# EAGLE board Xbee_shield-GiantPanel-v15 (EAGLE 6.5.0), part 1 of 3
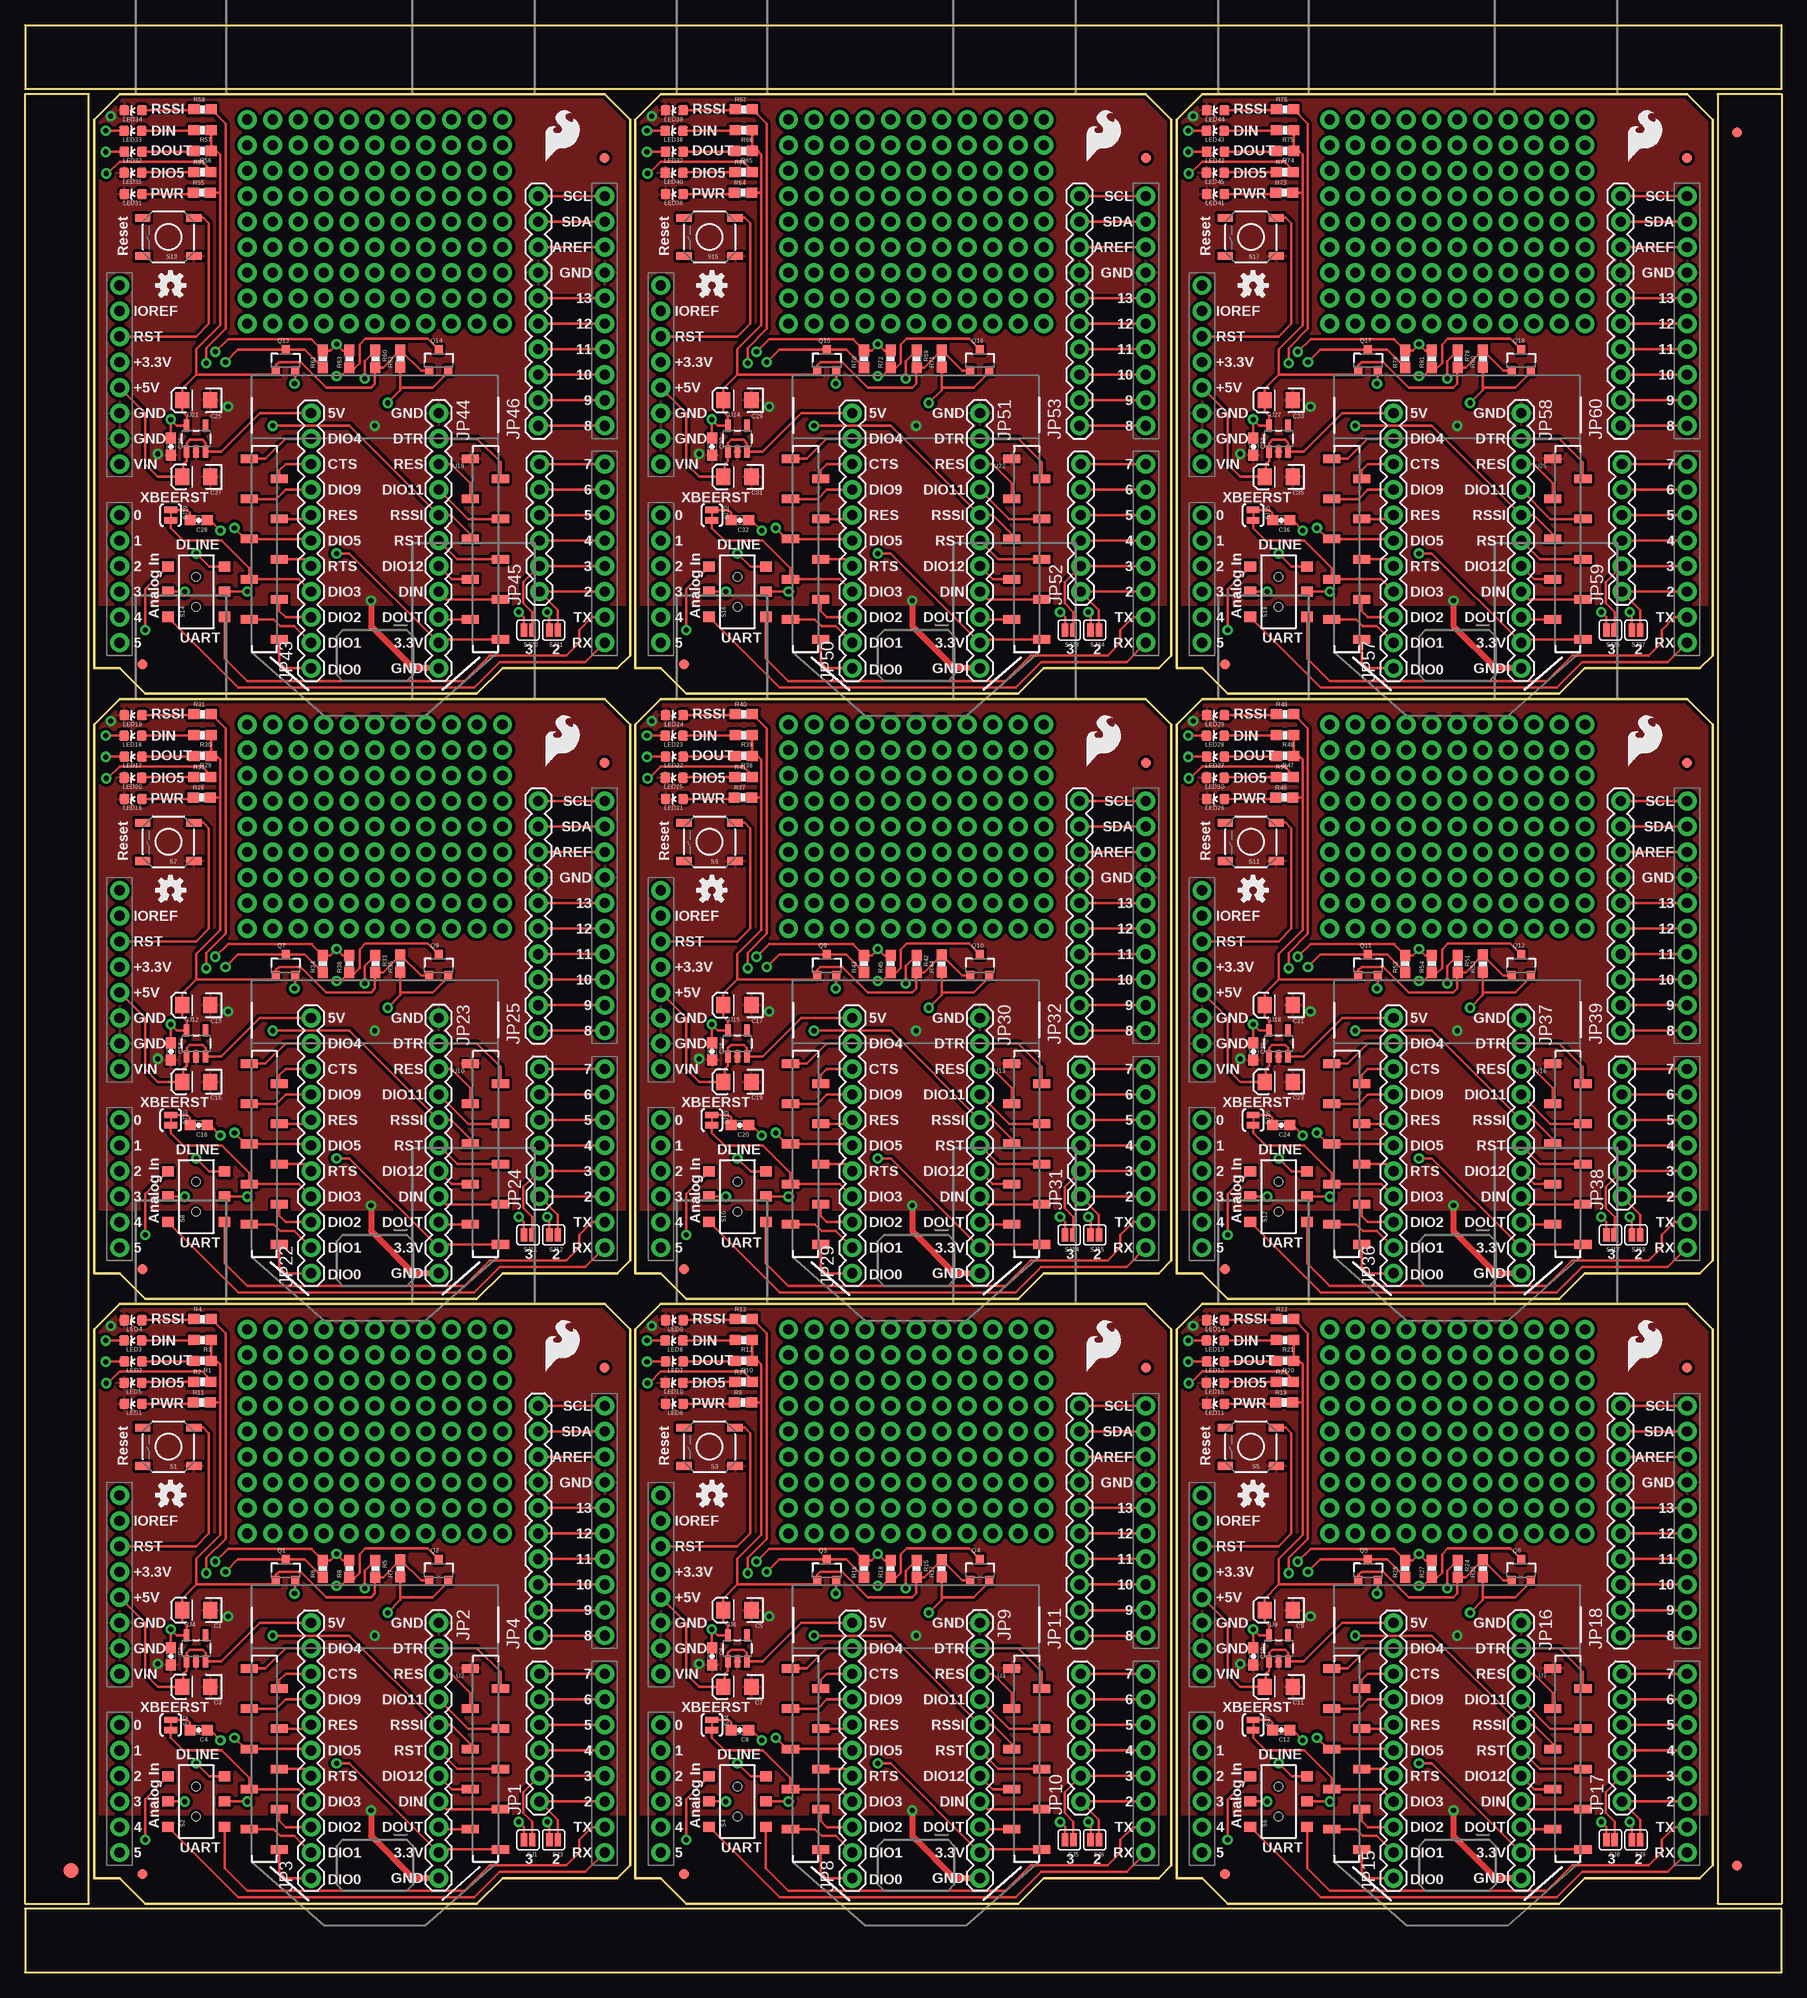
[diagram p0: board, top side]
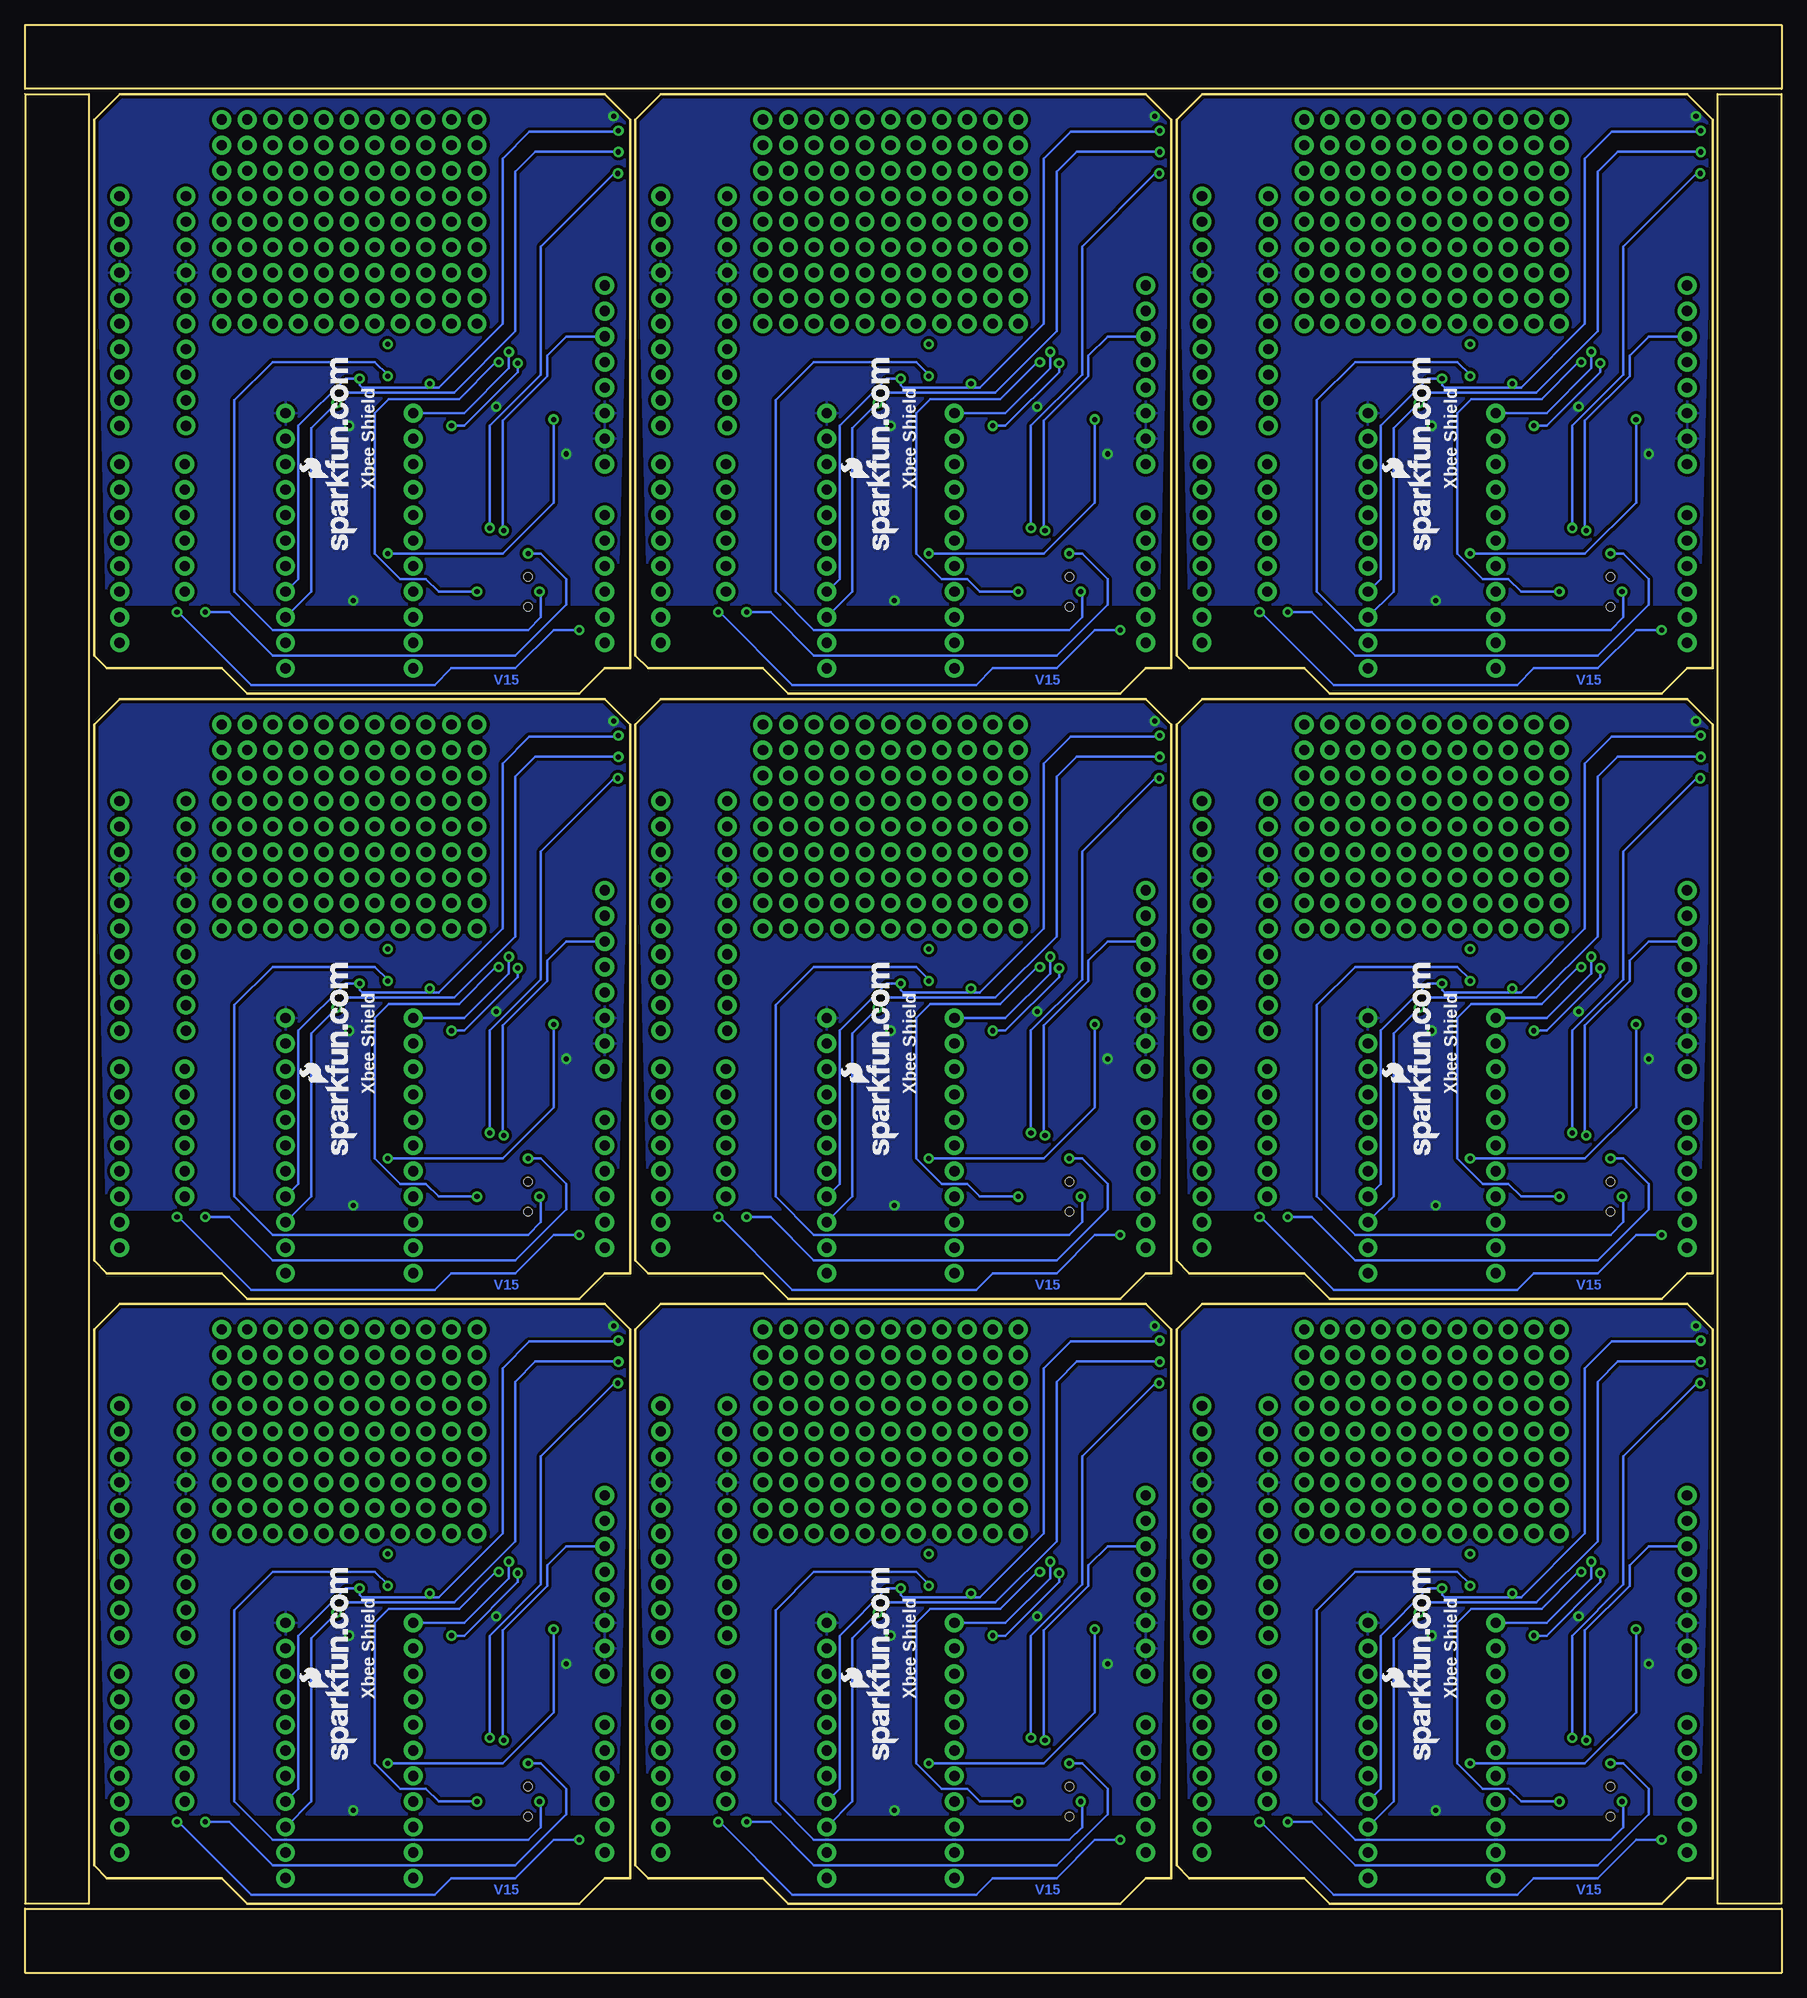
[diagram p1: board, bottom side, seen from below]

Size 174.75 x 193.8 mm. Coordinates in mm from the lower left corner, seen from the top.
Outline: 6.86,9.4 6.86,64.01 9.4,66.55 57.66,66.55 60.2,64.01 60.2,10.67 58.93,9.4 47.5,9.4 44.96,6.86 11.94,6.86 9.4,9.4 6.86,9.4
Outline: 60.71,9.4 60.71,64.01 63.25,66.55 111.51,66.55 114.05,64.01 114.05,10.67 112.78,9.4 101.35,9.4 98.81,6.86 65.79,6.86 63.25,9.4 60.71,9.4
Outline: 114.55,9.4 114.55,64.01 117.09,66.55 165.35,66.55 167.89,64.01 167.89,10.67 166.62,9.4 155.19,9.4 152.65,6.86 119.63,6.86 117.09,9.4 114.55,9.4
Outline: 6.86,69.6 6.86,124.21 9.4,126.75 57.66,126.75 60.2,124.21 60.2,70.87 58.93,69.6 47.5,69.6 44.96,67.06 11.94,67.06 9.4,69.6 6.86,69.6
Outline: 60.71,69.6 60.71,124.21 63.25,126.75 111.51,126.75 114.05,124.21 114.05,70.87 112.78,69.6 101.35,69.6 98.81,67.06 65.79,67.06 63.25,69.6 60.71,69.6
Outline: 114.55,69.6 114.55,124.21 117.09,126.75 165.35,126.75 167.89,124.21 167.89,70.87 166.62,69.6 155.19,69.6 152.65,67.06 119.63,67.06 117.09,69.6 114.55,69.6
Outline: 6.86,129.79 6.86,184.4 9.4,186.94 57.66,186.94 60.2,184.4 60.2,131.06 58.93,129.79 47.5,129.79 44.96,127.25 11.94,127.25 9.4,129.79 6.86,129.79
Outline: 60.71,129.79 60.71,184.4 63.25,186.94 111.51,186.94 114.05,184.4 114.05,131.06 112.78,129.79 101.35,129.79 98.81,127.25 65.79,127.25 63.25,129.79 60.71,129.79
Outline: 114.55,129.79 114.55,184.4 117.09,186.94 165.35,186.94 167.89,184.4 167.89,131.06 166.62,129.79 155.19,129.79 152.65,127.25 119.63,127.25 117.09,129.79 114.55,129.79
Outline: 6.35,6.86 6.35,186.94 0,186.94 0,6.86 6.35,6.86
Outline: 0,6.35 0,0 174.75,0 174.75,6.35 0,6.35
Outline: 168.4,6.86 174.75,6.86 174.75,186.94 168.4,186.94 168.4,6.86
Outline: 174.75,187.45 174.75,193.8 0,193.8 0,187.45 174.75,187.45
Copper layers (1*16): Top 0.035mm / dielectric 1.5mm / Bottom 0.035mm
Design rules "SparkFun-2-layer": minimum track width 7mil, minimum drill 15mil, track to track 8mil, track to pad 8mil, pad to pad 8mil, via to via 8mil, smd to smd 8mil, copper to edge 8mil, drill to drill 8mil, minimum pad ring 12mil, minimum via ring 10mil, stop-mask expansion 4mil, vias tented up to drill 20mil, thermal gap 10mil
Net classes: 0 default: width 0.203 mm; 1 vcc: width 0.305 mm

## Footprints (pad centres in the part's own frame; a part is rotated, then mirrored left to right if it is on the bottom)
EIA3216 = smd 1.4 x 1.6: A 1.4,0; C -1.4,0
0603-CAP = smd 1.1 x 1: 1 -0.85,0; 2 0.85,0
FIDUCIAL-1.5X3 = smd 1.5 x 1.5: 1 0,0
FIDUCIAL-1X2 = smd 1 x 1: 1 0,0
1X06 = drill 1.016 pad 1.88: 1 0,0; 2 2.54,0; 3 5.08,0; 4 7.62,0; 5 10.16,0; 6 12.7,0
1X11 = drill 1.016 pad 1.88: 1 0,0; 2 2.54,0; 3 5.08,0; 4 7.62,0; 5 10.16,0; 6 12.7,0; 7 15.24,0; 8 17.78,0; 9 20.32,0; 10 22.86,0; 11 25.4,0
1X10 = drill 1.016 pad 1.88: 1 0,0; 2 2.54,0; 3 5.08,0; 4 7.62,0; 5 10.16,0; 6 12.7,0; 7 15.24,0; 8 17.78,0; 9 20.32,0; 10 22.86,0
LED-0603 = smd 1 x 1: A 0,-0.877; C 0,0.877
SOT23-3 = smd 0.8 x 0.9: 1 -0.95,-1; 2 0.95,-1; 3 0,1.1
0603-RES = smd 1.1 x 1: 1 -0.85,0; 2 0.85,0
TACTILE_SWITCH_SMD = smd 1.524 x 0.762: 1 -2.54,1.905; 2 2.54,1.905; 3 -2.54,-1.905; 4 2.54,-1.905
AYZ0202 = smd 1 x 1.15: 1 -2.5,2.825; 2 0,2.825; 3 2.5,2.825; 4 -2.5,-2.825; 5 0,-2.825; 6 2.5,-2.825 | hole 0.85: 1.5,0; -1.5,0
SJ_2S = smd 0.635 x 1.27: 1 -0.412,0; 2 0.412,0
SJ_2S-TRACE = smd 0.635 x 1.27: 1 -0.508,0; 2 0.508,0
UNO_R3_SHIELD = drill 1.016 pad 1.88: 3.3V 50.8,26.67; 5V 50.8,29.21; A0 50.8,41.91; A1 50.8,44.45; A2 50.8,46.99; A3 50.8,49.53; A4 50.8,52.07; A5 50.8,54.61; AREF 2.54,15.24; D2 2.54,49.53; D3 2.54,46.99; D4 2.54,44.45; D5 2.54,41.91; D6 2.54,39.37; D7 2.54,36.83; D8 2.54,33.02; D9 2.54,30.48; D10 2.54,27.94; D11 2.54,25.4; D12 2.54,22.86; D13 2.54,20.32; GND@0 50.8,31.75; GND@1 50.8,34.29; GND@2 2.54,17.78; IOREF 50.8,21.59; NC 50.8,19.05; RES 50.8,24.13; RX 2.54,54.61; SCL 2.54,10.16; SDA 2.54,12.7; TX 2.54,52.07; VIN 50.8,36.83
XBEE-SMD = smd 1.7 x 0.85: 1 -12.5,20; 2 -9.5,18; 3 -12.5,16; 4 -9.5,14; 5 -12.5,12; 6 -9.5,10; 7 -12.5,8; 8 -9.5,6; 9 -12.5,4; 10 -9.5,2; 11 12.5,2; 12 9.5,4; 13 12.5,6; 14 9.5,8; 15 12.5,10; 16 9.5,12; 17 12.5,14; 18 9.5,16; 19 12.5,18; 20 9.5,20
SOT23-5 = smd 0.55 x 1.2: 1 -0.95,-1.3; 2 0,-1.3; 3 0.95,-1.3; 4 0.95,1.3; 5 -0.95,1.3

## Placement (x,y rotation side)
C1  10uF  [EIA3216]  17.02,36.07 180 top
C2  0.1uF  [0603-CAP]  14.5,31.47 270 top
C3  10uF  [EIA3216]  17.02,28.45 180 top
C4  0.1uF  [0603-CAP]  17.27,24.13 180 top
C5  10uF  [EIA3216]  70.87,36.07 180 top
C6  0.1uF  [0603-CAP]  68.35,31.47 270 top
C7  10uF  [EIA3216]  70.87,28.45 180 top
C8  0.1uF  [0603-CAP]  71.12,24.13 180 top
C9  10uF  [EIA3216]  124.71,36.07 180 top
C10  0.1uF  [0603-CAP]  122.2,31.47 270 top
C11  10uF  [EIA3216]  124.71,28.45 180 top
C12  0.1uF  [0603-CAP]  124.97,24.13 180 top
C13  10uF  [EIA3216]  17.02,96.27 180 top
C14  0.1uF  [0603-CAP]  14.5,91.67 270 top
C15  10uF  [EIA3216]  17.02,88.65 180 top
C16  0.1uF  [0603-CAP]  17.27,84.33 180 top
C17  10uF  [EIA3216]  70.87,96.27 180 top
C18  0.1uF  [0603-CAP]  68.35,91.67 270 top
C19  10uF  [EIA3216]  70.87,88.65 180 top
C20  0.1uF  [0603-CAP]  71.12,84.33 180 top
C21  10uF  [EIA3216]  124.71,96.27 180 top
C22  0.1uF  [0603-CAP]  122.2,91.67 270 top
C23  10uF  [EIA3216]  124.71,88.65 180 top
C24  0.1uF  [0603-CAP]  124.97,84.33 180 top
C25  10uF  [EIA3216]  17.02,156.46 180 top
C26  0.1uF  [0603-CAP]  14.5,151.87 270 top
C27  10uF  [EIA3216]  17.02,148.84 180 top
C28  0.1uF  [0603-CAP]  17.27,144.53 180 top
C29  10uF  [EIA3216]  70.87,156.46 180 top
C30  0.1uF  [0603-CAP]  68.35,151.87 270 top
C31  10uF  [EIA3216]  70.87,148.84 180 top
C32  0.1uF  [0603-CAP]  71.12,144.53 180 top
C33  10uF  [EIA3216]  124.71,156.46 180 top
C34  0.1uF  [0603-CAP]  122.2,151.87 270 top
C35  10uF  [EIA3216]  124.71,148.84 180 top
C36  0.1uF  [0603-CAP]  124.97,144.53 180 top
E$1  [FIDUCIAL-1.5X3]  4.57,10.16 0 top
E$4  [FIDUCIAL-1X2]  170.31,10.67 0 top
E$5  [FIDUCIAL-1X2]  170.31,183.13 180 top
JP1  [1X06]  51.18,17.02 90 top
JP2  M11PTH  [1X11]  41.15,34.8 270 top
JP3  M11PTH  [1X11]  28.45,9.4 90 top
JP4  [1X10]  51.05,33.53 90 top
JP5  FIDUCIAL1X2  [FIDUCIAL-1X2]  11.68,9.78 0 top
JP6  FIDUCIAL1X2  [FIDUCIAL-1X2]  57.66,60.2 0 top
JP7  LOGO-SFENEW  [SFE-NEW-WEBLOGO]  34.04,21.21 90 bottom
JP8  M11PTH  [1X11]  82.3,9.4 90 top
JP9  M11PTH  [1X11]  95,34.8 270 top
JP10  [1X06]  105.03,17.02 90 top
JP11  [1X10]  104.9,33.53 90 top
JP12  FIDUCIAL1X2  [FIDUCIAL-1X2]  65.53,9.78 0 top
JP13  FIDUCIAL1X2  [FIDUCIAL-1X2]  111.51,60.2 0 top
JP14  LOGO-SFENEW  [SFE-NEW-WEBLOGO]  87.88,21.21 90 bottom
JP15  M11PTH  [1X11]  136.14,9.4 90 top
JP16  M11PTH  [1X11]  148.84,34.8 270 top
JP17  [1X06]  158.88,17.02 90 top
JP18  [1X10]  158.75,33.53 90 top
JP19  FIDUCIAL1X2  [FIDUCIAL-1X2]  119.38,9.78 0 top
JP20  FIDUCIAL1X2  [FIDUCIAL-1X2]  165.35,60.2 0 top
JP21  LOGO-SFENEW  [SFE-NEW-WEBLOGO]  141.73,21.21 90 bottom
JP22  M11PTH  [1X11]  28.45,69.6 90 top
JP23  M11PTH  [1X11]  41.15,95 270 top
JP24  [1X06]  51.18,77.22 90 top
JP25  [1X10]  51.05,93.73 90 top
JP26  FIDUCIAL1X2  [FIDUCIAL-1X2]  11.68,69.98 0 top
JP27  FIDUCIAL1X2  [FIDUCIAL-1X2]  57.66,120.4 0 top
JP28  LOGO-SFENEW  [SFE-NEW-WEBLOGO]  34.04,81.41 90 bottom
JP29  M11PTH  [1X11]  82.3,69.6 90 top
JP30  M11PTH  [1X11]  95,95 270 top
JP31  [1X06]  105.03,77.22 90 top
JP32  [1X10]  104.9,93.73 90 top
JP33  FIDUCIAL1X2  [FIDUCIAL-1X2]  65.53,69.98 0 top
JP34  FIDUCIAL1X2  [FIDUCIAL-1X2]  111.51,120.4 0 top
JP35  LOGO-SFENEW  [SFE-NEW-WEBLOGO]  87.88,81.41 90 bottom
JP36  M11PTH  [1X11]  136.14,69.6 90 top
JP37  M11PTH  [1X11]  148.84,95 270 top
JP38  [1X06]  158.88,77.22 90 top
JP39  [1X10]  158.75,93.73 90 top
JP40  FIDUCIAL1X2  [FIDUCIAL-1X2]  119.38,69.98 0 top
JP41  FIDUCIAL1X2  [FIDUCIAL-1X2]  165.35,120.4 0 top
JP42  LOGO-SFENEW  [SFE-NEW-WEBLOGO]  141.73,81.41 90 bottom
JP43  M11PTH  [1X11]  28.45,129.79 90 top
JP44  M11PTH  [1X11]  41.15,155.19 270 top
JP45  [1X06]  51.18,137.41 90 top
JP46  [1X10]  51.05,153.92 90 top
JP47  FIDUCIAL1X2  [FIDUCIAL-1X2]  11.68,130.18 0 top
JP48  FIDUCIAL1X2  [FIDUCIAL-1X2]  57.66,180.59 0 top
JP49  LOGO-SFENEW  [SFE-NEW-WEBLOGO]  34.04,141.6 90 bottom
JP50  M11PTH  [1X11]  82.3,129.79 90 top
JP51  M11PTH  [1X11]  95,155.19 270 top
JP52  [1X06]  105.03,137.41 90 top
JP53  [1X10]  104.9,153.92 90 top
JP54  FIDUCIAL1X2  [FIDUCIAL-1X2]  65.53,130.18 0 top
JP55  FIDUCIAL1X2  [FIDUCIAL-1X2]  111.51,180.59 0 top
JP56  LOGO-SFENEW  [SFE-NEW-WEBLOGO]  87.88,141.6 90 bottom
JP57  M11PTH  [1X11]  136.14,129.79 90 top
JP58  M11PTH  [1X11]  148.84,155.19 270 top
JP59  [1X06]  158.88,137.41 90 top
JP60  [1X10]  158.75,153.92 90 top
JP61  FIDUCIAL1X2  [FIDUCIAL-1X2]  119.38,130.18 0 top
JP62  FIDUCIAL1X2  [FIDUCIAL-1X2]  165.35,180.59 0 top
JP63  LOGO-SFENEW  [SFE-NEW-WEBLOGO]  141.73,141.6 90 bottom
LED1  Red  [LED-0603]  10.74,56.59 90 top
LED2  Red  [LED-0603]  10.74,60.81 90 top
LED3  Green  [LED-0603]  10.72,62.89 90 top
LED4  Green  [LED-0603]  10.74,64.92 90 top
LED5  Green  [LED-0603]  10.72,58.7 90 top
LED6  Red  [LED-0603]  64.59,56.59 90 top
LED7  Red  [LED-0603]  64.59,60.81 90 top
LED8  Green  [LED-0603]  64.57,62.89 90 top
LED9  Green  [LED-0603]  64.59,64.92 90 top
LED10  Green  [LED-0603]  64.57,58.7 90 top
LED11  Red  [LED-0603]  118.44,56.59 90 top
LED12  Red  [LED-0603]  118.44,60.81 90 top
LED13  Green  [LED-0603]  118.41,62.89 90 top
LED14  Green  [LED-0603]  118.44,64.92 90 top
LED15  Green  [LED-0603]  118.41,58.7 90 top
LED16  Red  [LED-0603]  10.74,116.79 90 top
LED17  Red  [LED-0603]  10.74,121.01 90 top
LED18  Green  [LED-0603]  10.72,123.09 90 top
LED19  Green  [LED-0603]  10.74,125.12 90 top
LED20  Green  [LED-0603]  10.72,118.9 90 top
LED21  Red  [LED-0603]  64.59,116.79 90 top
LED22  Red  [LED-0603]  64.59,121.01 90 top
LED23  Green  [LED-0603]  64.57,123.09 90 top
LED24  Green  [LED-0603]  64.59,125.12 90 top
LED25  Green  [LED-0603]  64.57,118.9 90 top
LED26  Red  [LED-0603]  118.44,116.79 90 top
LED27  Red  [LED-0603]  118.44,121.01 90 top
LED28  Green  [LED-0603]  118.41,123.09 90 top
LED29  Green  [LED-0603]  118.44,125.12 90 top
LED30  Green  [LED-0603]  118.41,118.9 90 top
LED31  Red  [LED-0603]  10.74,176.99 90 top
LED32  Red  [LED-0603]  10.74,181.2 90 top
LED33  Green  [LED-0603]  10.72,183.29 90 top
LED34  Green  [LED-0603]  10.74,185.32 90 top
LED35  Green  [LED-0603]  10.72,179.1 90 top
LED36  Red  [LED-0603]  64.59,176.99 90 top
LED37  Red  [LED-0603]  64.59,181.2 90 top
LED38  Green  [LED-0603]  64.57,183.29 90 top
LED39  Green  [LED-0603]  64.59,185.32 90 top
LED40  Green  [LED-0603]  64.57,179.1 90 top
LED41  Red  [LED-0603]  118.44,176.99 90 top
LED42  Red  [LED-0603]  118.44,181.2 90 top
LED43  Green  [LED-0603]  118.41,183.29 90 top
LED44  Green  [LED-0603]  118.44,185.32 90 top
LED45  Green  [LED-0603]  118.41,179.1 90 top
Q1  MOSFET-NCHANNELSMD  [SOT23-3]  25.91,40.01 0 top
Q2  MOSFET-NCHANNELSMD  [SOT23-3]  41.15,40.01 0 top
Q3  MOSFET-NCHANNELSMD  [SOT23-3]  79.76,40.01 0 top
Q4  MOSFET-NCHANNELSMD  [SOT23-3]  95,40.01 0 top
Q5  MOSFET-NCHANNELSMD  [SOT23-3]  133.6,40.01 0 top
Q6  MOSFET-NCHANNELSMD  [SOT23-3]  148.84,40.01 0 top
Q7  MOSFET-NCHANNELSMD  [SOT23-3]  25.91,100.2 0 top
Q8  MOSFET-NCHANNELSMD  [SOT23-3]  41.15,100.2 0 top
Q9  MOSFET-NCHANNELSMD  [SOT23-3]  79.76,100.2 0 top
Q10  MOSFET-NCHANNELSMD  [SOT23-3]  95,100.2 0 top
Q11  MOSFET-NCHANNELSMD  [SOT23-3]  133.6,100.2 0 top
Q12  MOSFET-NCHANNELSMD  [SOT23-3]  148.84,100.2 0 top
Q13  MOSFET-NCHANNELSMD  [SOT23-3]  25.91,160.4 0 top
Q14  MOSFET-NCHANNELSMD  [SOT23-3]  41.15,160.4 0 top
Q15  MOSFET-NCHANNELSMD  [SOT23-3]  79.76,160.4 0 top
Q16  MOSFET-NCHANNELSMD  [SOT23-3]  95,160.4 0 top
Q17  MOSFET-NCHANNELSMD  [SOT23-3]  133.6,160.4 0 top
Q18  MOSFET-NCHANNELSMD  [SOT23-3]  148.84,160.4 0 top
R1  1k  [0603-RES]  17.65,60.88 180 top
R2  1k  [0603-RES]  17.63,58.78 0 top
R3  1k  [0603-RES]  17.65,62.94 180 top
R4  1k  [0603-RES]  17.65,65.02 0 top
R5  1k  [0603-RES]  34.85,40.18 270 top
R6  1k  [0603-RES]  29.62,40.18 90 top
R7  1k  [0603-RES]  37.34,40.21 90 top
R8  1k  [0603-RES]  32.26,40.18 90 top
R9  1k  [0603-RES]  71.42,56.74 0 top
R10  1k  [0603-RES]  71.5,60.88 180 top
R11  1k  [0603-RES]  17.58,56.74 0 top
R12  1k  [0603-RES]  71.5,62.94 180 top
R13  1k  [0603-RES]  71.5,65.02 0 top
R14  1k  [0603-RES]  71.48,58.78 0 top
R15  1k  [0603-RES]  88.7,40.18 270 top
R16  1k  [0603-RES]  83.46,40.18 90 top
R17  1k  [0603-RES]  91.19,40.21 90 top
R18  1k  [0603-RES]  86.11,40.18 90 top
R19  1k  [0603-RES]  125.27,56.74 0 top
R20  1k  [0603-RES]  125.35,60.88 180 top
R21  1k  [0603-RES]  125.35,62.94 180 top
R22  1k  [0603-RES]  125.35,65.02 0 top
R23  1k  [0603-RES]  125.32,58.78 0 top
R24  1k  [0603-RES]  142.54,40.18 270 top
R25  1k  [0603-RES]  137.31,40.18 90 top
R26  1k  [0603-RES]  145.03,40.21 90 top
R27  1k  [0603-RES]  139.95,40.18 90 top
R28  1k  [0603-RES]  17.58,116.94 0 top
R29  1k  [0603-RES]  17.65,121.08 180 top
R30  1k  [0603-RES]  17.65,123.14 180 top
R31  1k  [0603-RES]  17.65,125.22 0 top
R32  1k  [0603-RES]  17.63,118.97 0 top
R33  1k  [0603-RES]  34.85,100.38 270 top
R34  1k  [0603-RES]  29.62,100.38 90 top
R35  1k  [0603-RES]  37.34,100.41 90 top
R36  1k  [0603-RES]  32.26,100.38 90 top
R37  1k  [0603-RES]  71.42,116.94 0 top
R38  1k  [0603-RES]  71.5,121.08 180 top
R39  1k  [0603-RES]  71.5,123.14 180 top
R40  1k  [0603-RES]  71.5,125.22 0 top
R41  1k  [0603-RES]  71.48,118.97 0 top
R42  1k  [0603-RES]  88.7,100.38 270 top
R43  1k  [0603-RES]  83.46,100.38 90 top
R44  1k  [0603-RES]  91.19,100.41 90 top
R45  1k  [0603-RES]  86.11,100.38 90 top
R46  1k  [0603-RES]  125.27,116.94 0 top
R47  1k  [0603-RES]  125.35,121.08 180 top
R48  1k  [0603-RES]  125.35,123.14 180 top
R49  1k  [0603-RES]  125.35,125.22 0 top
R50  1k  [0603-RES]  125.32,118.97 0 top
R51  1k  [0603-RES]  142.54,100.38 270 top
R52  1k  [0603-RES]  137.31,100.38 90 top
R53  1k  [0603-RES]  145.03,100.41 90 top
R54  1k  [0603-RES]  139.95,100.38 90 top
R55  1k  [0603-RES]  17.58,177.14 0 top
R56  1k  [0603-RES]  17.65,181.28 180 top
R57  1k  [0603-RES]  17.65,183.34 180 top
R58  1k  [0603-RES]  17.65,185.42 0 top
R59  1k  [0603-RES]  17.63,179.17 0 top
R60  1k  [0603-RES]  34.85,160.58 270 top
R61  1k  [0603-RES]  29.62,160.58 90 top
R62  1k  [0603-RES]  37.34,160.6 90 top
R63  1k  [0603-RES]  32.26,160.58 90 top
R64  1k  [0603-RES]  71.42,177.14 0 top
R65  1k  [0603-RES]  71.5,181.28 180 top
R66  1k  [0603-RES]  71.5,183.34 180 top
R67  1k  [0603-RES]  71.5,185.42 0 top
R68  1k  [0603-RES]  71.48,179.17 0 top
R69  1k  [0603-RES]  88.7,160.58 270 top
R70  1k  [0603-RES]  83.46,160.58 90 top
R71  1k  [0603-RES]  91.19,160.6 90 top
R72  1k  [0603-RES]  86.11,160.58 90 top
R73  1k  [0603-RES]  125.27,177.14 0 top
R74  1k  [0603-RES]  125.35,181.28 180 top
R75  1k  [0603-RES]  125.35,183.34 180 top
R76  1k  [0603-RES]  125.35,185.42 0 top
R77  1k  [0603-RES]  125.32,179.17 0 top
R78  1k  [0603-RES]  142.54,160.58 270 top
R79  1k  [0603-RES]  137.31,160.58 90 top
R80  1k  [0603-RES]  145.03,160.6 90 top
R81  1k  [0603-RES]  139.95,160.58 90 top
S1  SWITCH-MOMENTARY-2SMD  [TACTILE_SWITCH_SMD]  14.25,52.32 180 top
S2  SWITCH-DPDTSMD  [AYZ0202]  17.02,17.02 90 top
S3  SWITCH-MOMENTARY-2SMD  [TACTILE_SWITCH_SMD]  68.1,52.32 180 top
S4  SWITCH-DPDTSMD  [AYZ0202]  70.87,17.02 90 top
S5  SWITCH-MOMENTARY-2SMD  [TACTILE_SWITCH_SMD]  121.95,52.32 180 top
S6  SWITCH-DPDTSMD  [AYZ0202]  124.71,17.02 90 top
S7  SWITCH-MOMENTARY-2SMD  [TACTILE_SWITCH_SMD]  14.25,112.52 180 top
S8  SWITCH-DPDTSMD  [AYZ0202]  17.02,77.22 90 top
S9  SWITCH-MOMENTARY-2SMD  [TACTILE_SWITCH_SMD]  68.1,112.52 180 top
S10  SWITCH-DPDTSMD  [AYZ0202]  70.87,77.22 90 top
S11  SWITCH-MOMENTARY-2SMD  [TACTILE_SWITCH_SMD]  121.95,112.52 180 top
S12  SWITCH-DPDTSMD  [AYZ0202]  124.71,77.22 90 top
S13  SWITCH-MOMENTARY-2SMD  [TACTILE_SWITCH_SMD]  14.25,172.72 180 top
S14  SWITCH-DPDTSMD  [AYZ0202]  17.02,137.41 90 top
S15  SWITCH-MOMENTARY-2SMD  [TACTILE_SWITCH_SMD]  68.1,172.72 180 top
S16  SWITCH-DPDTSMD  [AYZ0202]  70.87,137.41 90 top
S17  SWITCH-MOMENTARY-2SMD  [TACTILE_SWITCH_SMD]  121.95,172.72 180 top
S18  SWITCH-DPDTSMD  [AYZ0202]  124.71,137.41 90 top
SJ1  D_TX  [SJ_2S]  50.04,13.21 180 top
SJ2  SOLDERJUMPERTRACE  [SJ_2S-TRACE]  14.48,24.64 270 top
SJ3  D_RX  [SJ_2S]  52.58,13.21 180 top
SJ4  SOLDERJUMPERTRACE  [SJ_2S-TRACE]  68.33,24.64 270 top
SJ5  D_TX  [SJ_2S]  103.89,13.21 180 top
SJ6  D_RX  [SJ_2S]  106.43,13.21 180 top
SJ7  SOLDERJUMPERTRACE  [SJ_2S-TRACE]  122.17,24.64 270 top
SJ8  D_TX  [SJ_2S]  157.73,13.21 180 top
SJ9  D_RX  [SJ_2S]  160.27,13.21 180 top
SJ10  SOLDERJUMPERTRACE  [SJ_2S-TRACE]  14.48,84.84 270 top
SJ11  D_TX  [SJ_2S]  50.04,73.41 180 top
SJ12  D_RX  [SJ_2S]  52.58,73.41 180 top
SJ13  SOLDERJUMPERTRACE  [SJ_2S-TRACE]  68.33,84.84 270 top
SJ14  D_TX  [SJ_2S]  103.89,73.41 180 top
SJ15  D_RX  [SJ_2S]  106.43,73.41 180 top
SJ16  SOLDERJUMPERTRACE  [SJ_2S-TRACE]  122.17,84.84 270 top
SJ17  D_TX  [SJ_2S]  157.73,73.41 180 top
SJ18  D_RX  [SJ_2S]  160.27,73.41 180 top
SJ19  SOLDERJUMPERTRACE  [SJ_2S-TRACE]  14.48,145.03 270 top
SJ20  D_TX  [SJ_2S]  50.04,133.6 180 top
SJ21  D_RX  [SJ_2S]  52.58,133.6 180 top
SJ22  SOLDERJUMPERTRACE  [SJ_2S-TRACE]  68.33,145.03 270 top
SJ23  D_TX  [SJ_2S]  103.89,133.6 180 top
SJ24  D_RX  [SJ_2S]  106.43,133.6 180 top
SJ25  SOLDERJUMPERTRACE  [SJ_2S-TRACE]  122.17,145.03 270 top
SJ26  D_TX  [SJ_2S]  157.73,133.6 180 top
SJ27  D_RX  [SJ_2S]  160.27,133.6 180 top
U1  ARDUINO_SHIELD  [UNO_R3_SHIELD]  60.2,66.55 180 top
U2  XBEE-1B3  [XBEE-SMD]  34.8,32.26 180 top
U3  XBEE-1B3  [XBEE-SMD]  88.65,32.26 180 top
U4  V_REG_LDOSMD  [SOT23-5]  17.02,32.26 0 top
U5  ARDUINO_SHIELD  [UNO_R3_SHIELD]  114.05,66.55 180 top
U6  V_REG_LDOSMD  [SOT23-5]  70.87,32.26 0 top
U7  XBEE-1B3  [XBEE-SMD]  142.49,32.26 180 top
U8  ARDUINO_SHIELD  [UNO_R3_SHIELD]  167.89,66.55 180 top
U9  V_REG_LDOSMD  [SOT23-5]  124.71,32.26 0 top
U10  XBEE-1B3  [XBEE-SMD]  34.8,92.46 180 top
U11  ARDUINO_SHIELD  [UNO_R3_SHIELD]  60.2,126.75 180 top
U12  V_REG_LDOSMD  [SOT23-5]  17.02,92.46 0 top
U13  XBEE-1B3  [XBEE-SMD]  88.65,92.46 180 top
U14  ARDUINO_SHIELD  [UNO_R3_SHIELD]  114.05,126.75 180 top
U15  V_REG_LDOSMD  [SOT23-5]  70.87,92.46 0 top
U16  XBEE-1B3  [XBEE-SMD]  142.49,92.46 180 top
U17  ARDUINO_SHIELD  [UNO_R3_SHIELD]  167.89,126.75 180 top
U18  V_REG_LDOSMD  [SOT23-5]  124.71,92.46 0 top
U19  XBEE-1B3  [XBEE-SMD]  34.8,152.65 180 top
U20  ARDUINO_SHIELD  [UNO_R3_SHIELD]  60.2,186.94 180 top
U21  V_REG_LDOSMD  [SOT23-5]  17.02,152.65 0 top
U22  XBEE-1B3  [XBEE-SMD]  88.65,152.65 180 top
U23  ARDUINO_SHIELD  [UNO_R3_SHIELD]  114.05,186.94 180 top
U24  V_REG_LDOSMD  [SOT23-5]  70.87,152.65 0 top
U25  XBEE-1B3  [XBEE-SMD]  142.49,152.65 180 top
U26  ARDUINO_SHIELD  [UNO_R3_SHIELD]  167.89,186.94 180 top
U27  V_REG_LDOSMD  [SOT23-5]  124.71,152.65 0 top
U$1  [SFE_LOGO_FLAME_.2]  51.44,59.56 0 top
U$2  OSHW-LOGOS  [OSHW-LOGO-S]  68.33,47.5 0 top
U$3  [SFE_LOGO_FLAME_.2]  105.28,59.56 0 top
U$4  OSHW-LOGOS  [OSHW-LOGO-S]  122.17,47.5 0 top
U$5  [SFE_LOGO_FLAME_.2]  159.13,59.56 0 top
U$6  OSHW-LOGOS  [OSHW-LOGO-S]  14.48,107.7 0 top
U$7  [SFE_LOGO_FLAME_.2]  51.44,119.76 0 top
U$8  OSHW-LOGOS  [OSHW-LOGO-S]  14.48,47.5 0 top
U$9  OSHW-LOGOS  [OSHW-LOGO-S]  68.33,107.7 0 top
U$10  [SFE_LOGO_FLAME_.2]  105.28,119.76 0 top
U$11  OSHW-LOGOS  [OSHW-LOGO-S]  122.17,107.7 0 top
U$12  [SFE_LOGO_FLAME_.2]  159.13,119.76 0 top
U$13  OSHW-LOGOS  [OSHW-LOGO-S]  14.48,167.89 0 top
U$14  [SFE_LOGO_FLAME_.2]  51.44,179.96 0 top
U$15  OSHW-LOGOS  [OSHW-LOGO-S]  68.33,167.89 0 top
U$16  [SFE_LOGO_FLAME_.2]  105.28,179.96 0 top
U$17  OSHW-LOGOS  [OSHW-LOGO-S]  122.17,167.89 0 top
U$18  [SFE_LOGO_FLAME_.2]  159.13,179.96 0 top

## Library data of the parts
C1 C3 C5 C7 C9 C11 C13 C15 C17 C19 C21 C23 C25 C27 C29 C31 C33 C35 JP1-JP3 JP5 JP6 JP8-JP10 JP12 JP13 JP15-JP17 JP19 JP20 JP22-JP24 JP26 JP27 JP29-JP31 JP33 JP34 JP36-JP38 JP40 JP41 JP43-JP45 JP47 JP48 JP50-JP52 JP54 JP55 JP57-JP59 JP61 JP62 S1-S18 SJ1-SJ27 U2 U3 U7 U10 U13 U16 U19 U22 U25 = SparkFun
C2 C4 C6 C8 C10 C12 C14 C16 C18 C20 C22 C24 C26 C28 C30 C32 C34 C36 = SparkFun-Capacitors; PROD_ID: CAP-00810
E$1 = SparkFun-Retired
E$4 E$5 JP7 JP14 JP21 JP28 JP35 JP42 JP49 JP56 JP63 U$1-U$18 = SparkFun-Aesthetics
JP4 JP11 JP18 JP25 JP32 JP39 JP46 JP53 JP60 = SparkFun-Connectors
LED1 LED2 LED6 LED7 LED11 LED12 LED16 LED17 LED21 LED22 LED26 LED27 LED31 LED32 LED36 LED37 LED41 LED42 = SparkFun-LED; PROD_ID: DIO-00819
LED3-LED5 LED8-LED10 LED13-LED15 LED18-LED20 LED23-LED25 LED28-LED30 LED33-LED35 LED38-LED40 LED43-LED45 = SparkFun-LED; PROD_ID: DIO-00821
Q1-Q18 = SparkFun-DiscreteSemi
R1-R81 = SparkFun-Resistors; PROD_ID: RES-07856
U1 U5 U8 U11 U14 U17 U20 U23 U26 = SparkFun-Boards
U4 U6 U9 U12 U15 U18 U21 U24 U27 = SparkFun-PowerIC

## Nets
3.3V: C1.A C2.1 JP2.10 Q1.1 Q2.1 R1.1 R3.1 R5.2 R7.2 R11.2 U2.1 U4.5
3.3V1: C5.A C6.1 JP9.10 Q3.1 Q4.1 R9.2 R10.1 R12.1 R15.2 R17.2 U3.1 U6.5
3.3V2: C9.A C10.1 JP16.10 Q5.1 Q6.1 R19.2 R20.1 R21.1 R24.2 R26.2 U7.1 U9.5
3.3V3: C13.A C14.1 JP23.10 Q7.1 Q8.1 R28.2 R29.1 R30.1 R33.2 R35.2 U10.1 U12.5
3.3V4: C17.A C18.1 JP30.10 Q9.1 Q10.1 R37.2 R38.1 R39.1 R42.2 R44.2 U13.1 U15.5
3.3V5: C21.A C22.1 JP37.10 Q11.1 Q12.1 R46.2 R47.1 R48.1 R51.2 R53.2 U16.1 U18.5
3.3V6: C25.A C26.1 JP44.10 Q13.1 Q14.1 R55.2 R56.1 R57.1 R60.2 R62.2 U19.1 U21.5
3.3V7: C29.A C30.1 JP51.10 Q15.1 Q16.1 R64.2 R65.1 R66.1 R69.2 R71.2 U22.1 U24.5
3.3V8: C33.A C34.1 JP58.10 Q17.1 Q18.1 R73.2 R74.1 R75.1 R78.2 R80.2 U25.1 U27.5
5V: C3.A JP3.11 R6.2 R8.2 U1.5V U4.1 U4.3
5V1: C7.A JP8.11 R16.2 R18.2 U5.5V U6.1 U6.3
5V2: C11.A JP15.11 R25.2 R27.2 U8.5V U9.1 U9.3
5V3: C15.A JP22.11 R34.2 R36.2 U11.5V U12.1 U12.3
5V4: C19.A JP29.11 R43.2 R45.2 U14.5V U15.1 U15.3
5V5: C23.A JP36.11 R52.2 R54.2 U17.5V U18.1 U18.3
5V6: C27.A JP43.11 R61.2 R63.2 U20.5V U21.1 U21.3
5V7: C31.A JP50.11 R70.2 R72.2 U23.5V U24.1 U24.3
5V8: C35.A JP57.11 R79.2 R81.2 U26.5V U27.1 U27.3
AREF: JP4.8 U1.AREF
AREF1: JP11.8 U5.AREF
AREF2: JP18.8 U8.AREF
AREF3: JP25.8 U11.AREF
AREF4: JP32.8 U14.AREF
AREF5: JP39.8 U17.AREF
AREF6: JP46.8 U20.AREF
AREF7: JP53.8 U23.AREF
AREF8: JP60.8 U26.AREF
CTS: JP3.9 U2.12
CTS1: JP8.9 U3.12
CTS2: JP15.9 U7.12
CTS3: JP22.9 U10.12
CTS4: JP29.9 U13.12
CTS5: JP36.9 U16.12
CTS6: JP43.9 U19.12
CTS7: JP50.9 U22.12
CTS8: JP57.9 U25.12
D_RX: JP1.1 SJ3.1 U1.D2
D_RX1: JP10.1 SJ6.1 U5.D2
D_RX2: JP17.1 SJ9.1 U8.D2
D_RX3: JP24.1 SJ12.1 U11.D2
D_RX4: JP31.1 SJ15.1 U14.D2
D_RX5: JP38.1 SJ18.1 U17.D2
D_RX6: JP45.1 SJ21.1 U20.D2
D_RX7: JP52.1 SJ24.1 U23.D2
D_RX8: JP59.1 SJ27.1 U26.D2
D_TX: JP1.2 SJ1.1 U1.D3
D_TX1: JP10.2 SJ5.1 U5.D3
D_TX2: JP17.2 SJ8.1 U8.D3
D_TX3: JP24.2 SJ11.1 U11.D3
D_TX4: JP31.2 SJ14.1 U14.D3
D_TX5: JP38.2 SJ17.1 U17.D3
D_TX6: JP45.2 SJ20.1 U20.D3
D_TX7: JP52.2 SJ23.1 U23.D3
D_TX8: JP59.2 SJ26.1 U26.D3
DIN: JP2.8 LED3.C Q1.2 R5.1 U2.3
DIN1: JP9.8 LED8.C Q3.2 R15.1 U3.3
DIN2: JP16.8 LED13.C Q5.2 R24.1 U7.3
DIN3: JP23.8 LED18.C Q7.2 R33.1 U10.3
DIN4: JP30.8 LED23.C Q9.2 R42.1 U13.3
DIN5: JP37.8 LED28.C Q11.2 R51.1 U16.3
DIN6: JP44.8 LED33.C Q13.2 R60.1 U19.3
DIN7: JP51.8 LED38.C Q15.2 R69.1 U22.3
DIN8: JP58.8 LED43.C Q17.2 R78.1 U25.3
DIO0: JP3.1 U2.20
DIO1: JP3.2 U2.19
DIO2: JP3.3 U2.18
DIO3: JP3.4 SJ2.2 U2.17
DIO4: JP3.10 U2.11
DIO5: JP3.6 R2.2 U2.15
DIO6: JP8.10 U3.11
DIO7: JP8.8 U3.13
DIO8: JP8.6 R14.2 U3.15
DIO9: JP3.8 U2.13
DIO10: JP8.4 SJ4.2 U3.17
DIO11: JP2.4 U2.7
DIO12: JP2.7 U2.4
DIO13: JP8.3 U3.18
DIO14: JP8.2 U3.19
DIO15: JP8.1 U3.20
DIO16: JP9.4 U3.7
DIO17: JP9.7 U3.4
DIO18: JP15.10 U7.11
DIO19: JP15.8 U7.13
DIO20: JP15.6 R23.2 U7.15
DIO21: JP15.4 SJ7.2 U7.17
DIO22: JP15.3 U7.18
DIO23: JP15.2 U7.19
DIO24: JP15.1 U7.20
DIO25: JP16.4 U7.7
DIO26: JP16.7 U7.4
DIO27: JP22.10 U10.11
DIO28: JP22.8 U10.13
DIO29: JP22.6 R32.2 U10.15
DIO30: JP22.4 SJ10.2 U10.17
DIO31: JP22.3 U10.18
DIO32: JP22.2 U10.19
DIO33: JP22.1 U10.20
DIO34: JP23.4 U10.7
DIO35: JP23.7 U10.4
DIO36: JP29.10 U13.11
DIO37: JP29.8 U13.13
DIO38: JP29.6 R41.2 U13.15
DIO39: JP29.4 SJ13.2 U13.17
DIO40: JP29.3 U13.18
DIO41: JP29.2 U13.19
DIO42: JP29.1 U13.20
DIO43: JP30.4 U13.7
DIO44: JP30.7 U13.4
DIO45: JP36.10 U16.11
DIO46: JP36.8 U16.13
DIO47: JP36.6 R50.2 U16.15
DIO48: JP36.4 SJ16.2 U16.17
DIO49: JP36.3 U16.18
DIO50: JP36.2 U16.19
DIO51: JP36.1 U16.20
DIO52: JP37.4 U16.7
DIO53: JP37.7 U16.4
DIO54: JP43.10 U19.11
DIO55: JP43.8 U19.13
DIO56: JP43.6 R59.2 U19.15
DIO57: JP43.4 SJ19.2 U19.17
DIO58: JP43.3 U19.18
DIO59: JP43.2 U19.19
DIO60: JP43.1 U19.20
DIO61: JP44.4 U19.7
DIO62: JP44.7 U19.4
DIO63: JP50.10 U22.11
DIO64: JP50.8 U22.13
DIO65: JP50.6 R68.2 U22.15
DIO66: JP50.4 SJ22.2 U22.17
DIO67: JP50.3 U22.18
DIO68: JP50.2 U22.19
DIO69: JP50.1 U22.20
DIO70: JP51.4 U22.7
DIO71: JP51.7 U22.4
DIO72: JP57.10 U25.11
DIO73: JP57.8 U25.13
DIO74: JP57.6 R77.2 U25.15
DIO75: JP57.4 SJ25.2 U25.17
DIO76: JP57.3 U25.18
DIO77: JP57.2 U25.19
DIO78: JP57.1 U25.20
DIO79: JP58.4 U25.7
DIO80: JP58.7 U25.4
DOUT: JP2.9 LED2.C Q2.2 R7.1 U2.2
DOUT1: JP9.9 LED7.C Q4.2 R17.1 U3.2
DOUT2: JP16.9 LED12.C Q6.2 R26.1 U7.2
DOUT3: JP23.9 LED17.C Q8.2 R35.1 U10.2
DOUT4: JP30.9 LED22.C Q10.2 R44.1 U13.2
DOUT5: JP37.9 LED27.C Q12.2 R53.1 U16.2
DOUT6: JP44.9 LED32.C Q14.2 R62.1 U19.2
DOUT7: JP51.9 LED37.C Q16.2 R71.1 U22.2
DOUT8: JP58.9 LED42.C Q18.2 R80.1 U25.2
DTR: JP2.2 U2.9
DTR1: JP9.2 U3.9
DTR2: JP16.2 U7.9
DTR3: JP23.2 U10.9
DTR4: JP30.2 U13.9
DTR5: JP37.2 U16.9
DTR6: JP44.2 U19.9
DTR7: JP51.2 U22.9
DTR8: JP58.2 U25.9
GND: C1.C C2.2 C3.C JP2.1 JP2.11 JP4.7 LED1.C LED4.C LED5.C S1.1 U1.GND@0 U1.GND@1 U1.GND@2 U2.10 U4.2
GND1: C5.C C6.2 C7.C JP9.1 JP9.11 JP11.7 LED6.C LED9.C LED10.C S3.1 U3.10 U5.GND@0 U5.GND@1 U5.GND@2 U6.2
GND2: C9.C C10.2 C11.C JP16.1 JP16.11 JP18.7 LED11.C LED14.C LED15.C S5.1 U7.10 U8.GND@0 U8.GND@1 U8.GND@2 U9.2
GND3: C13.C C14.2 C15.C JP23.1 JP23.11 JP25.7 LED16.C LED19.C LED20.C S7.1 U10.10 U11.GND@0 U11.GND@1 U11.GND@2 U12.2
GND4: C17.C C18.2 C19.C JP30.1 JP30.11 JP32.7 LED21.C LED24.C LED25.C S9.1 U13.10 U14.GND@0 U14.GND@1 U14.GND@2 U15.2
GND5: C21.C C22.2 C23.C JP37.1 JP37.11 JP39.7 LED26.C LED29.C LED30.C S11.1 U16.10 U17.GND@0 U17.GND@1 U17.GND@2 U18.2
GND6: C25.C C26.2 C27.C JP44.1 JP44.11 JP46.7 LED31.C LED34.C LED35.C S13.1 U19.10 U20.GND@0 U20.GND@1 U20.GND@2 U21.2
GND7: C29.C C30.2 C31.C JP51.1 JP51.11 JP53.7 LED36.C LED39.C LED40.C S15.1 U22.10 U23.GND@0 U23.GND@1 U23.GND@2 U24.2
GND8: C33.C C34.2 C35.C JP58.1 JP58.11 JP60.7 LED41.C LED44.C LED45.C S17.1 U25.10 U26.GND@0 U26.GND@1 U26.GND@2 U27.2
IN: Q1.3 R6.1 S2.5
IN1: Q3.3 R16.1 S4.5
IN2: Q5.3 R25.1 S6.5
IN3: Q7.3 R34.1 S8.5
IN4: Q9.3 R43.1 S10.5
IN5: Q11.3 R52.1 S12.5
IN6: Q13.3 R61.1 S14.5
IN7: Q15.3 R70.1 S16.5
IN8: Q17.3 R79.1 S18.5
N$1: LED2.A R1.2
N$2: LED4.A R4.1
N$3: JP4.6 U1.D13
N$4: LED3.A R3.2
N$5: C4.2 SJ2.1
N$6: JP4.9 U1.SDA
N$7: JP4.10 U1.SCL
N$8: LED6.A R9.1
N$9: LED7.A R10.2
N$10: LED8.A R12.2
N$11: LED9.A R13.1
N$12: C8.2 SJ4.1
N$17: JP4.1 U1.D8
N$18: JP4.2 U1.D9
N$30: JP4.3 U1.D10
N$38: LED1.A R11.1
N$43: JP4.4 U1.D11
N$55: JP4.5 U1.D12
N$139: LED5.A R2.1
N$140: S2.6 SJ1.2
N$141: S2.3 SJ3.2
N$142: JP1.3 U1.D4
N$143: JP1.4 U1.D5
N$144: JP1.5 U1.D6
N$145: JP1.6 U1.D7
N$224: LED10.A R14.1
N$225: S4.6 SJ5.2
N$226: S4.3 SJ6.2
N$227: JP10.3 U5.D4
N$228: JP10.4 U5.D5
N$229: JP10.5 U5.D6
N$230: JP10.6 U5.D7
N$231: JP11.1 U5.D8
N$232: JP11.2 U5.D9
N$233: JP11.3 U5.D10
N$234: JP11.4 U5.D11
N$235: JP11.5 U5.D12
N$236: JP11.6 U5.D13
N$237: JP11.9 U5.SDA
N$238: JP11.10 U5.SCL
N$239: LED11.A R19.1
N$240: LED12.A R20.2
N$241: LED13.A R21.2
N$242: LED14.A R22.1
N$243: C12.2 SJ7.1
N$343: LED15.A R23.1
N$344: S6.6 SJ8.2
N$345: S6.3 SJ9.2
N$346: JP17.3 U8.D4
N$347: JP17.4 U8.D5
N$348: JP17.5 U8.D6
N$349: JP17.6 U8.D7
N$350: JP18.1 U8.D8
N$351: JP18.2 U8.D9
N$352: JP18.3 U8.D10
N$353: JP18.4 U8.D11
N$354: JP18.5 U8.D12
N$355: JP18.6 U8.D13
N$356: JP18.9 U8.SDA
N$357: JP18.10 U8.SCL
N$358: LED16.A R28.1
N$359: LED17.A R29.2
N$360: LED18.A R30.2
N$361: LED19.A R31.1
N$362: C16.2 SJ10.1
N$462: LED20.A R32.1
N$463: S8.6 SJ11.2
N$464: S8.3 SJ12.2
N$465: JP24.3 U11.D4
N$466: JP24.4 U11.D5
N$467: JP24.5 U11.D6
N$468: JP24.6 U11.D7
N$469: JP25.1 U11.D8
N$470: JP25.2 U11.D9
N$471: JP25.3 U11.D10
N$472: JP25.4 U11.D11
N$473: JP25.5 U11.D12
N$474: JP25.6 U11.D13
N$475: JP25.9 U11.SDA
N$476: JP25.10 U11.SCL
N$477: LED21.A R37.1
N$478: LED22.A R38.2
N$479: LED23.A R39.2
N$480: LED24.A R40.1
N$481: C20.2 SJ13.1
N$581: LED25.A R41.1
N$582: S10.6 SJ14.2
N$583: S10.3 SJ15.2
N$584: JP31.3 U14.D4
N$585: JP31.4 U14.D5
N$586: JP31.5 U14.D6
N$587: JP31.6 U14.D7
N$588: JP32.1 U14.D8
N$589: JP32.2 U14.D9
N$590: JP32.3 U14.D10
N$591: JP32.4 U14.D11
N$592: JP32.5 U14.D12
N$593: JP32.6 U14.D13
N$594: JP32.9 U14.SDA
N$595: JP32.10 U14.SCL
N$596: LED26.A R46.1
N$597: LED27.A R47.2
N$598: LED28.A R48.2
N$599: LED29.A R49.1
N$600: C24.2 SJ16.1
N$700: LED30.A R50.1
N$701: S12.6 SJ17.2
N$702: S12.3 SJ18.2
N$703: JP38.3 U17.D4
N$704: JP38.4 U17.D5
N$705: JP38.5 U17.D6
N$706: JP38.6 U17.D7
N$707: JP39.1 U17.D8
N$708: JP39.2 U17.D9
N$709: JP39.3 U17.D10
N$710: JP39.4 U17.D11
N$711: JP39.5 U17.D12
N$712: JP39.6 U17.D13
N$713: JP39.9 U17.SDA
N$714: JP39.10 U17.SCL
N$715: LED31.A R55.1
N$716: LED32.A R56.2
N$717: LED33.A R57.2
N$718: LED34.A R58.1
N$719: C28.2 SJ19.1
N$819: LED35.A R59.1
N$820: S14.6 SJ20.2
N$821: S14.3 SJ21.2
N$822: JP45.3 U20.D4
N$823: JP45.4 U20.D5
N$824: JP45.5 U20.D6
N$825: JP45.6 U20.D7
N$826: JP46.1 U20.D8
N$827: JP46.2 U20.D9
N$828: JP46.3 U20.D10
N$829: JP46.4 U20.D11
N$830: JP46.5 U20.D12
N$831: JP46.6 U20.D13
N$832: JP46.9 U20.SDA
N$833: JP46.10 U20.SCL
N$834: LED36.A R64.1
N$835: LED37.A R65.2
N$836: LED38.A R66.2
N$837: LED39.A R67.1
N$838: C32.2 SJ22.1
N$938: LED40.A R68.1
N$939: S16.6 SJ23.2
N$940: S16.3 SJ24.2
N$941: JP52.3 U23.D4
N$942: JP52.4 U23.D5
N$943: JP52.5 U23.D6
N$944: JP52.6 U23.D7
N$945: JP53.1 U23.D8
N$946: JP53.2 U23.D9
N$947: JP53.3 U23.D10
N$948: JP53.4 U23.D11
N$949: JP53.5 U23.D12
N$950: JP53.6 U23.D13
N$951: JP53.9 U23.SDA
N$952: JP53.10 U23.SCL
N$953: LED41.A R73.1
N$954: LED42.A R74.2
N$955: LED43.A R75.2
N$956: LED44.A R76.1
N$957: C36.2 SJ25.1
N$1057: LED45.A R77.1
N$1058: S18.6 SJ26.2
N$1059: S18.3 SJ27.2
N$1060: JP59.3 U26.D4
N$1061: JP59.4 U26.D5
N$1062: JP59.5 U26.D6
N$1063: JP59.6 U26.D7
N$1064: JP60.1 U26.D8
N$1065: JP60.2 U26.D9
N$1066: JP60.3 U26.D10
N$1067: JP60.4 U26.D11
N$1068: JP60.5 U26.D12
N$1069: JP60.6 U26.D13
N$1070: JP60.9 U26.SDA
N$1071: JP60.10 U26.SCL
OUT: Q2.3 R8.1 S2.2
OUT1: Q4.3 R18.1 S4.2
OUT2: Q6.3 R27.1 S6.2
OUT3: Q8.3 R36.1 S8.2
OUT4: Q10.3 R45.1 S10.2
OUT5: Q12.3 R54.1 S12.2
OUT6: Q14.3 R63.1 S14.2
OUT7: Q16.3 R72.1 S16.2
OUT8: Q18.3 R81.1 S18.2
RES1: JP2.3 U2.8
RES2: JP3.7 U2.14
RES3: JP9.3 U3.8
RES4: JP8.7 U3.14
RES5: JP16.3 U7.8
RES6: JP15.7 U7.14
RES7: JP23.3 U10.8
RES8: JP22.7 U10.14
RES9: JP30.3 U13.8
RES10: JP29.7 U13.14
RES11: JP37.3 U16.8
RES12: JP36.7 U16.14
RES13: JP44.3 U19.8
RES14: JP43.7 U19.14
RES15: JP51.3 U22.8
RES16: JP50.7 U22.14
RES17: JP58.3 U25.8
RES18: JP57.7 U25.14
RESET: JP2.6 U2.5
RESET1: JP9.6 U3.5
RESET2: JP16.6 U7.5
RESET3: JP23.6 U10.5
RESET4: JP30.6 U13.5
RESET5: JP37.6 U16.5
RESET6: JP44.6 U19.5
RESET7: JP51.6 U22.5
RESET8: JP58.6 U25.5
RSSI: JP2.5 R4.2 U2.6
RSSI1: JP9.5 R13.2 U3.6
RSSI2: JP16.5 R22.2 U7.6
RSSI3: JP23.5 R31.2 U10.6
RSSI4: JP30.5 R40.2 U13.6
RSSI5: JP37.5 R49.2 U16.6
RSSI6: JP44.5 R58.2 U19.6
RSSI7: JP51.5 R67.2 U22.6
RSSI8: JP58.5 R76.2 U25.6
RST: C4.1 S1.3 U1.RES
RST1: C8.1 S3.3 U5.RES
RST2: C12.1 S5.3 U8.RES
RST3: C16.1 S7.3 U11.RES
RST4: C20.1 S9.3 U14.RES
RST5: C24.1 S11.3 U17.RES
RST6: C28.1 S13.3 U20.RES
RST7: C32.1 S15.3 U23.RES
RST8: C36.1 S17.3 U26.RES
RTS: JP3.5 U2.16
RTS1: JP8.5 U3.16
RTS2: JP15.5 U7.16
RTS3: JP22.5 U10.16
RTS4: JP29.5 U13.16
RTS5: JP36.5 U16.16
RTS6: JP43.5 U19.16
RTS7: JP50.5 U22.16
RTS8: JP57.5 U25.16
UART_RX: S2.1 U1.RX
UART_RX1: S4.1 U5.RX
UART_RX2: S6.1 U8.RX
UART_RX3: S8.1 U11.RX
UART_RX4: S10.1 U14.RX
UART_RX5: S12.1 U17.RX
UART_RX6: S14.1 U20.RX
UART_RX7: S16.1 U23.RX
UART_RX8: S18.1 U26.RX
UART_TX: S2.4 U1.TX
UART_TX1: S4.4 U5.TX
UART_TX2: S6.4 U8.TX
UART_TX3: S8.4 U11.TX
UART_TX4: S10.4 U14.TX
UART_TX5: S12.4 U17.TX
UART_TX6: S14.4 U20.TX
UART_TX7: S16.4 U23.TX
UART_TX8: S18.4 U26.TX
VIN: U1.VIN
VIN1: U5.VIN
VIN2: U8.VIN
VIN3: U11.VIN
VIN4: U14.VIN
VIN5: U17.VIN
VIN6: U20.VIN
VIN7: U23.VIN
VIN8: U26.VIN

## Tracks (layer width: path | path; a pad name or v marks a point on that pad's centre or on a via)
3.3V  (via drill 0.51)
  Top 0.254: R3.1 R1.1 19.02,60.88 19.41,60.5 19.41,56.74 | U2.1 41.47,12.26 JP2.10 32.26,20.83 v30.99,20.83 | 17.02,38.61 15.62,37.21 C1.A 15.62,34.93 16.07,34.48 U4.5 15.08,33.56 v14.48,34.16 14.48,32.35 C2.1 | 17.02,38.61 24.69,38.61 24.96,38.88 Q1.1 24.96,39.56 25.27,39.88 27.43,39.88 29.97,37.34 34.42,37.34 34.8,37.72 34.8,39.28 R5.2 35.61,39.33 R7.2 39.39,39.01 Q2.1 | 17.02,38.61 17.02,41.15 19.41,43.54 19.41,56.74 | R11.2 19.41,56.74
  Bottom 0.254: v30.99,20.83 19.56,20.83 14.48,25.91 v14.48,34.16
3.3V1  (via drill 0.51)
  Top 0.254: R12.1 R10.1 72.87,60.88 73.25,60.5 73.25,56.74 | U3.1 95.32,12.26 JP9.10 86.11,20.83 v84.84,20.83 | 70.87,38.61 69.47,37.21 C5.A 69.47,34.93 69.92,34.48 U6.5 68.93,33.56 v68.33,34.16 68.33,32.35 C6.1 | 70.87,38.61 78.54,38.61 78.81,38.88 Q3.1 78.81,39.56 79.12,39.88 81.28,39.88 83.82,37.34 88.27,37.34 88.65,37.72 88.65,39.28 R15.2 89.46,39.33 R17.2 93.24,39.01 Q4.1 | 70.87,38.61 70.87,41.15 73.25,43.54 73.25,56.74 | R9.2 73.25,56.74
  Bottom 0.254: v84.84,20.83 73.41,20.83 68.33,25.91 v68.33,34.16
3.3V2  (via drill 0.51)
  Top 0.254: R21.1 R20.1 126.72,60.88 127.1,60.5 127.1,56.74 | U7.1 149.16,12.26 JP16.10 139.95,20.83 v138.68,20.83 | 124.71,38.61 123.31,37.21 C9.A 123.31,34.93 123.76,34.48 U9.5 122.78,33.56 v122.17,34.16 122.17,32.35 C10.1 | 124.71,38.61 132.38,38.61 132.65,38.88 Q5.1 132.65,39.56 132.97,39.88 135.13,39.88 137.67,37.34 142.11,37.34 142.49,37.72 142.49,39.28 R24.2 143.31,39.33 R26.2 147.09,39.01 Q6.1 | 124.71,38.61 124.71,41.15 127.1,43.54 127.1,56.74 | R19.2 127.1,56.74
  Bottom 0.254: v138.68,20.83 127.25,20.83 122.17,25.91 v122.17,34.16
3.3V3  (via drill 0.51)
  Top 0.254: R30.1 R29.1 19.02,121.08 19.41,120.7 19.41,116.94 | U10.1 41.47,72.46 JP23.10 32.26,81.03 v30.99,81.03 | 17.02,98.81 15.62,97.41 C13.A 15.62,95.13 16.07,94.68 U12.5 15.08,93.76 v14.48,94.36 14.48,92.54 C14.1 | 17.02,98.81 24.69,98.81 24.96,99.08 Q7.1 24.96,99.76 25.27,100.08 27.43,100.08 29.97,97.54 34.42,97.54 34.8,97.92 34.8,99.48 R33.2 35.61,99.53 R35.2 39.39,99.2 Q8.1 | 17.02,98.81 17.02,101.35 19.41,103.73 19.41,116.94 | R28.2 19.41,116.94
  Bottom 0.254: v30.99,81.03 19.56,81.03 14.48,86.11 v14.48,94.36
3.3V4  (via drill 0.51)
  Top 0.254: R39.1 R38.1 72.87,121.08 73.25,120.7 73.25,116.94 | U13.1 95.32,72.46 JP30.10 86.11,81.03 v84.84,81.03 | 70.87,98.81 69.47,97.41 C17.A 69.47,95.13 69.92,94.68 U15.5 68.93,93.76 v68.33,94.36 68.33,92.54 C18.1 | 70.87,98.81 78.54,98.81 78.81,99.08 Q9.1 78.81,99.76 79.12,100.08 81.28,100.08 83.82,97.54 88.27,97.54 88.65,97.92 88.65,99.48 R42.2 89.46,99.53 R44.2 93.24,99.2 Q10.1 | 70.87,98.81 70.87,101.35 73.25,103.73 73.25,116.94 | R37.2 73.25,116.94
  Bottom 0.254: v84.84,81.03 73.41,81.03 68.33,86.11 v68.33,94.36
3.3V5  (via drill 0.51)
  Top 0.254: R48.1 R47.1 126.72,121.08 127.1,120.7 127.1,116.94 | U16.1 149.16,72.46 JP37.10 139.95,81.03 v138.68,81.03 | 124.71,98.81 123.31,97.41 C21.A 123.31,95.13 123.76,94.68 U18.5 122.78,93.76 v122.17,94.36 122.17,92.54 C22.1 | 124.71,98.81 132.38,98.81 132.65,99.08 Q11.1 132.65,99.76 132.97,100.08 135.13,100.08 137.67,97.54 142.11,97.54 142.49,97.92 142.49,99.48 R51.2 143.31,99.53 R53.2 147.09,99.2 Q12.1 | 124.71,98.81 124.71,101.35 127.1,103.73 127.1,116.94 | R46.2 127.1,116.94
  Bottom 0.254: v138.68,81.03 127.25,81.03 122.17,86.11 v122.17,94.36
3.3V6  (via drill 0.51)
  Top 0.254: R57.1 R56.1 19.02,181.28 19.41,180.9 19.41,177.14 | U19.1 41.47,132.65 JP44.10 32.26,141.22 v30.99,141.22 | 17.02,159 15.62,157.6 C25.A 15.62,155.32 16.07,154.87 U21.5 15.08,153.95 v14.48,154.56 14.48,152.74 C26.1 | 17.02,159 24.69,159 24.96,159.27 Q13.1 24.96,159.96 25.27,160.27 27.43,160.27 29.97,157.73 34.42,157.73 34.8,158.12 34.8,159.68 R60.2 35.61,159.73 R62.2 39.39,159.4 Q14.1 | 17.02,159 17.02,161.54 19.41,163.93 19.41,177.14 | R55.2 19.41,177.14
  Bottom 0.254: v30.99,141.22 19.56,141.22 14.48,146.3 v14.48,154.56
3.3V7  (via drill 0.51)
  Top 0.254: R66.1 R65.1 72.87,181.28 73.25,180.9 73.25,177.14 | U22.1 95.32,132.65 JP51.10 86.11,141.22 v84.84,141.22 | 70.87,159 69.47,157.6 C29.A 69.47,155.32 69.92,154.87 U24.5 68.93,153.95 v68.33,154.56 68.33,152.74 C30.1 | 70.87,159 78.54,159 78.81,159.27 Q15.1 78.81,159.96 79.12,160.27 81.28,160.27 83.82,157.73 88.27,157.73 88.65,158.12 88.65,159.68 R69.2 89.46,159.73 R71.2 93.24,159.4 Q16.1 | 70.87,159 70.87,161.54 73.25,163.93 73.25,177.14 | R64.2 73.25,177.14
  Bottom 0.254: v84.84,141.22 73.41,141.22 68.33,146.3 v68.33,154.56
3.3V8  (via drill 0.51)
  Top 0.254: R75.1 R74.1 126.72,181.28 127.1,180.9 127.1,177.14 | U25.1 149.16,132.65 JP58.10 139.95,141.22 v138.68,141.22 | 124.71,159 123.31,157.6 C33.A 123.31,155.32 123.76,154.87 U27.5 122.78,153.95 v122.17,154.56 122.17,152.74 C34.1 | 124.71,159 132.38,159 132.65,159.27 Q17.1 132.65,159.96 132.97,160.27 135.13,160.27 137.67,157.73 142.11,157.73 142.49,158.12 142.49,159.68 R78.2 143.31,159.73 R80.2 147.09,159.4 Q18.1 | 124.71,159 124.71,161.54 127.1,163.93 127.1,177.14 | R73.2 127.1,177.14
  Bottom 0.254: v138.68,141.22 127.25,141.22 122.17,146.3 v122.17,154.56
5V  (via drill 0.51)
  Top 0.254: U1.5V 11.94,34.8 11.94,29.72 13.21,28.45 C3.A 15.75,28.58 15.75,29.72 16.07,30.04 U4.1 16.07,31.82 16.38,32.13 17.65,32.13 17.97,31.82 U4.3 19.53,30.96 23.37,34.8 JP3.11 | v18.92,40.89 20.19,42.16 28.54,42.16 28.54,42.11 R6.2 30.36,41.03 v30.99,41.66 31.61,41.03 R8.2
  Bottom 0.254: JP3.11 23.37,34.8 18.92,39.24 v18.92,40.89
5V1  (via drill 0.51)
  Top 0.254: U5.5V 65.79,34.8 65.79,29.72 67.06,28.45 C7.A 69.6,28.58 69.6,29.72 69.92,30.04 U6.1 69.92,31.82 70.23,32.13 71.5,32.13 71.82,31.82 U6.3 73.38,30.96 77.22,34.8 JP8.11 | v72.77,40.89 74.04,42.16 82.38,42.16 82.38,42.11 R16.2 84.21,41.03 v84.84,41.66 85.46,41.03 R18.2
  Bottom 0.254: JP8.11 77.22,34.8 72.77,39.24 v72.77,40.89
5V2  (via drill 0.51)
  Top 0.254: U8.5V 119.63,34.8 119.63,29.72 120.9,28.45 C11.A 123.44,28.58 123.44,29.72 123.76,30.04 U9.1 123.76,31.82 124.08,32.13 125.35,32.13 125.66,31.82 U9.3 127.22,30.96 131.06,34.8 JP15.11 | v126.62,40.89 127.89,42.16 136.23,42.16 136.23,42.11 R25.2 138.06,41.03 v138.68,41.66 139.31,41.03 R27.2
  Bottom 0.254: JP15.11 131.06,34.8 126.62,39.24 v126.62,40.89
5V3  (via drill 0.51)
  Top 0.254: U11.5V 11.94,95 11.94,89.92 13.21,88.65 C15.A 15.75,88.78 15.75,89.92 16.07,90.24 U12.1 16.07,92.01 16.38,92.33 17.65,92.33 17.97,92.01 U12.3 19.53,91.16 23.37,95 JP22.11 | v18.92,101.09 20.19,102.36 28.54,102.36 28.54,102.31 R34.2 30.36,101.23 v30.99,101.85 31.61,101.23 R36.2
  Bottom 0.254: JP22.11 23.37,95 18.92,99.44 v18.92,101.09
5V4  (via drill 0.51)
  Top 0.254: U14.5V 65.79,95 65.79,89.92 67.06,88.65 C19.A 69.6,88.78 69.6,89.92 69.92,90.24 U15.1 69.92,92.01 70.23,92.33 71.5,92.33 71.82,92.01 U15.3 73.38,91.16 77.22,95 JP29.11 | v72.77,101.09 74.04,102.36 82.38,102.36 82.38,102.31 R43.2 84.21,101.23 v84.84,101.85 85.46,101.23 R45.2
  Bottom 0.254: JP29.11 77.22,95 72.77,99.44 v72.77,101.09
5V5  (via drill 0.51)
  Top 0.254: U17.5V 119.63,95 119.63,89.92 120.9,88.65 C23.A 123.44,88.78 123.44,89.92 123.76,90.24 U18.1 123.76,92.01 124.08,92.33 125.35,92.33 125.66,92.01 U18.3 127.22,91.16 131.06,95 JP36.11 | v126.62,101.09 127.89,102.36 136.23,102.36 136.23,102.31 R52.2 138.06,101.23 v138.68,101.85 139.31,101.23 R54.2
  Bottom 0.254: JP36.11 131.06,95 126.62,99.44 v126.62,101.09
5V6  (via drill 0.51)
  Top 0.254: U20.5V 11.94,155.19 11.94,150.11 13.21,148.84 C27.A 15.75,148.97 15.75,150.11 16.07,150.43 U21.1 16.07,152.21 16.38,152.53 17.65,152.53 17.97,152.21 U21.3 19.53,151.35 23.37,155.19 JP43.11 | v18.92,161.29 20.19,162.56 28.54,162.56 28.54,162.51 R61.2 30.36,161.43 v30.99,162.05 31.61,161.43 R63.2
  Bottom 0.254: JP43.11 23.37,155.19 18.92,159.64 v18.92,161.29
5V7  (via drill 0.51)
  Top 0.254: U23.5V 65.79,155.19 65.79,150.11 67.06,148.84 C31.A 69.6,148.97 69.6,150.11 69.92,150.43 U24.1 69.92,152.21 70.23,152.53 71.5,152.53 71.82,152.21 U24.3 73.38,151.35 77.22,155.19 JP50.11 | v72.77,161.29 74.04,162.56 82.38,162.56 82.38,162.51 R70.2 84.21,161.43 v84.84,162.05 85.46,161.43 R72.2
  Bottom 0.254: JP50.11 77.22,155.19 72.77,159.64 v72.77,161.29
5V8  (via drill 0.51)
  Top 0.254: U26.5V 119.63,155.19 119.63,150.11 120.9,148.84 C35.A 123.44,148.97 123.44,150.11 123.76,150.43 U27.1 123.76,152.21 124.08,152.53 125.35,152.53 125.66,152.21 U27.3 127.22,151.35 131.06,155.19 JP57.11 | v126.62,161.29 127.89,162.56 136.23,162.56 136.23,162.51 R79.2 138.06,161.43 v138.68,162.05 139.31,161.43 R81.2
  Bottom 0.254: JP57.11 131.06,155.19 126.62,159.64 v126.62,161.29
AREF
  Top 0.254: JP4.8 U1.AREF
AREF1
  Top 0.254: JP11.8 U5.AREF
AREF2
  Top 0.254: JP18.8 U8.AREF
AREF3
  Top 0.254: JP25.8 U11.AREF
AREF4
  Top 0.254: JP32.8 U14.AREF
AREF5
  Top 0.254: JP39.8 U17.AREF
AREF6
  Top 0.254: JP46.8 U20.AREF
AREF7
  Top 0.254: JP53.8 U23.AREF
AREF8
  Top 0.254: JP60.8 U26.AREF
CTS
  Top 0.254: U2.12 25.3,29.11 25.91,29.72 JP3.9
CTS1
  Top 0.254: U3.12 79.15,29.11 79.76,29.72 JP8.9
CTS2
  Top 0.254: U7.12 132.99,29.11 133.6,29.72 JP15.9
CTS3
  Top 0.254: U10.12 25.3,89.31 25.91,89.92 JP22.9
CTS4
  Top 0.254: U13.12 79.15,89.31 79.76,89.92 JP29.9
CTS5
  Top 0.254: U16.12 132.99,89.31 133.6,89.92 JP36.9
CTS6
  Top 0.254: U19.12 25.3,149.5 25.91,150.11 JP43.9
CTS7
  Top 0.254: U22.12 79.15,149.5 79.76,150.11 JP50.9
CTS8
  Top 0.254: U25.12 132.99,149.5 133.6,150.11 JP57.9
D_RX
  Top 0.254: U1.D2 JP1.1 52.99,15.21 SJ3.1
D_RX1
  Top 0.254: U5.D2 JP10.1 106.84,15.21 SJ6.1
D_RX2
  Top 0.254: U8.D2 JP17.1 160.69,15.21 SJ9.1
D_RX3
  Top 0.254: U11.D2 JP24.1 52.99,75.41 SJ12.1
D_RX4
  Top 0.254: U14.D2 JP31.1 106.84,75.41 SJ15.1
D_RX5
  Top 0.254: U17.D2 JP38.1 160.69,75.41 SJ18.1
D_RX6
  Top 0.254: U20.D2 JP45.1 52.99,135.6 SJ21.1
D_RX7
  Top 0.254: U23.D2 JP52.1 106.84,135.6 SJ24.1
D_RX8
  Top 0.254: U26.D2 JP59.1 160.69,135.6 SJ27.1
D_TX
  Top 0.254: JP1.2 U1.D3 | 51.69,19.56 JP1.2 | SJ1.1 50.45,15.01 49.58,15.88 49.58,17.96 JP1.2
D_TX1
  Top 0.254: JP10.2 U5.D3 | 105.54,19.56 JP10.2 | SJ5.1 104.3,15.01 103.43,15.88 103.43,17.96 JP10.2
D_TX2
  Top 0.254: JP17.2 U8.D3 | 159.38,19.56 JP17.2 | SJ8.1 158.15,15.01 157.28,15.88 157.28,17.96 JP17.2
D_TX3
  Top 0.254: JP24.2 U11.D3 | 51.69,79.76 JP24.2 | SJ11.1 50.45,75.2 49.58,76.07 49.58,78.16 JP24.2
D_TX4
  Top 0.254: JP31.2 U14.D3 | 105.54,79.76 JP31.2 | SJ14.1 104.3,75.2 103.43,76.07 103.43,78.16 JP31.2
D_TX5
  Top 0.254: JP38.2 U17.D3 | 159.38,79.76 JP38.2 | SJ17.1 158.15,75.2 157.28,76.07 157.28,78.16 JP38.2
D_TX6
  Top 0.254: JP45.2 U20.D3 | 51.69,139.95 JP45.2 | SJ20.1 50.45,135.4 49.58,136.27 49.58,138.35 JP45.2
D_TX7
  Top 0.254: JP52.2 U23.D3 | 105.54,139.95 JP52.2 | SJ23.1 104.3,135.4 103.43,136.27 103.43,138.35 JP52.2
D_TX8
  Top 0.254: JP59.2 U26.D3 | 159.38,139.95 JP59.2 | SJ26.1 158.15,135.4 157.28,136.27 157.28,138.35 JP59.2
DIN  (via drill 0.51)
  Top 0.254: v8.03,62.89 LED3.C | U2.3 41.91,16.26 JP2.8 | v33.78,38.23 33.78,39.97 R5.1 | v26.8,37.72 26.86,37.78 Q1.2
  Bottom 0.254: JP2.8 39.88,18.29 39.88,33.53 35.18,38.23 v33.78,38.23 33.78,37.59 33.53,37.34 26.8,37.34 | 26.8,37.34 25.91,37.34 19.56,43.69 19.56,60.12 16.89,62.79 8.13,62.79 v8.03,62.89 | v26.8,37.72 26.8,37.34
DIN1  (via drill 0.51)
  Top 0.254: v61.87,62.89 LED8.C | U3.3 95.76,16.26 JP9.8 | v87.63,38.23 87.63,39.97 R15.1 | v80.64,37.72 80.71,37.78 Q3.2
  Bottom 0.254: JP9.8 93.73,18.29 93.73,33.53 89.03,38.23 v87.63,38.23 87.63,37.59 87.38,37.34 80.64,37.34 | 80.64,37.34 79.76,37.34 73.41,43.69 73.41,60.12 70.74,62.79 61.98,62.79 v61.87,62.89 | v80.64,37.72 80.64,37.34
DIN2  (via drill 0.51)
  Top 0.254: v115.72,62.89 LED13.C | U7.3 149.6,16.26 JP16.8 | v141.48,38.23 141.48,39.97 R24.1 | v134.49,37.72 134.55,37.78 Q5.2
  Bottom 0.254: JP16.8 147.57,18.29 147.57,33.53 142.88,38.23 v141.48,38.23 141.48,37.59 141.22,37.34 134.49,37.34 | 134.49,37.34 133.6,37.34 127.25,43.69 127.25,60.12 124.59,62.79 115.82,62.79 v115.72,62.89 | v134.49,37.72 134.49,37.34
DIN3  (via drill 0.51)
  Top 0.254: v8.03,123.09 LED18.C | U10.3 41.91,76.46 JP23.8 | v33.78,98.42 33.78,100.16 R33.1 | v26.8,97.92 26.86,97.98 Q7.2
  Bottom 0.254: JP23.8 39.88,78.49 39.88,93.73 35.18,98.42 v33.78,98.42 33.78,97.79 33.53,97.54 26.8,97.54 | 26.8,97.54 25.91,97.54 19.56,103.89 19.56,120.32 16.89,122.99 8.13,122.99 v8.03,123.09 | v26.8,97.92 26.8,97.54
DIN4  (via drill 0.51)
  Top 0.254: v61.87,123.09 LED23.C | U13.3 95.76,76.46 JP30.8 | v87.63,98.42 87.63,100.16 R42.1 | v80.64,97.92 80.71,97.98 Q9.2
  Bottom 0.254: JP30.8 93.73,78.49 93.73,93.73 89.03,98.42 v87.63,98.42 87.63,97.79 87.38,97.54 80.64,97.54 | 80.64,97.54 79.76,97.54 73.41,103.89 73.41,120.32 70.74,122.99 61.98,122.99 v61.87,123.09 | v80.64,97.92 80.64,97.54
DIN5  (via drill 0.51)
  Top 0.254: v115.72,123.09 LED28.C | U16.3 149.6,76.46 JP37.8 | v141.48,98.42 141.48,100.16 R51.1 | v134.49,97.92 134.55,97.98 Q11.2
  Bottom 0.254: JP37.8 147.57,78.49 147.57,93.73 142.88,98.42 v141.48,98.42 141.48,97.79 141.22,97.54 134.49,97.54 | 134.49,97.54 133.6,97.54 127.25,103.89 127.25,120.32 124.59,122.99 115.82,122.99 v115.72,123.09 | v134.49,97.92 134.49,97.54
DIN6  (via drill 0.51)
  Top 0.254: v8.03,183.29 LED33.C | U19.3 41.91,136.65 JP44.8 | v33.78,158.62 33.78,160.36 R60.1 | v26.8,158.12 26.86,158.18 Q13.2
  Bottom 0.254: JP44.8 39.88,138.68 39.88,153.92 35.18,158.62 v33.78,158.62 33.78,157.99 33.53,157.73 26.8,157.73 | 26.8,157.73 25.91,157.73 19.56,164.08 19.56,180.52 16.89,183.19 8.13,183.19 v8.03,183.29 | v26.8,158.12 26.8,157.73
DIN7  (via drill 0.51)
  Top 0.254: v61.87,183.29 LED38.C | U22.3 95.76,136.65 JP51.8 | v87.63,158.62 87.63,160.36 R69.1 | v80.64,158.12 80.71,158.18 Q15.2
  Bottom 0.254: JP51.8 93.73,138.68 93.73,153.92 89.03,158.62 v87.63,158.62 87.63,157.99 87.38,157.73 80.64,157.73 | 80.64,157.73 79.76,157.73 73.41,164.08 73.41,180.52 70.74,183.19 61.98,183.19 v61.87,183.29 | v80.64,158.12 80.64,157.73
DIN8  (via drill 0.51)
  Top 0.254: v115.72,183.29 LED43.C | U25.3 149.6,136.65 JP58.8 | v141.48,158.62 141.48,160.36 R78.1 | v134.49,158.12 134.55,158.18 Q17.2
  Bottom 0.254: JP58.8 147.57,138.68 147.57,153.92 142.88,158.62 v141.48,158.62 141.48,157.99 141.22,157.73 134.49,157.73 | 134.49,157.73 133.6,157.73 127.25,164.08 127.25,180.52 124.59,183.19 115.82,183.19 v115.72,183.29 | v134.49,158.12 134.49,157.73
DIO0
  Top 0.254: U2.20 25.3,10.01 25.91,9.4 JP3.1
DIO1
  Top 0.254: JP3.2 26.8,13.59 25.4,13.59 24.73,14.26 U2.19
DIO2
  Top 0.254: U2.18 25.3,15.09 25.91,14.48 JP3.3
DIO3
  Top 0.254: JP3.4 27.21,18.26 U2.17 22.3,19.36 19.56,22.1 15.75,22.1 14.48,23.37 SJ2.2
DIO4
  Top 0.254: U2.11 23.91,30.26 25.91,32.26 JP3.10
DIO5  (via drill 0.51)
  Top 0.254: JP3.6 28.29,22.26 U2.15 21.94,22.26 v20.83,23.37 | v8.08,58.65 8.23,58.65 9.4,59.82 17.61,59.82 18.48,58.95 R2.2
  Bottom 0.254: v20.83,23.37 20.83,33.53 15.75,38.61 15.75,51.36 8.46,58.65 v8.08,58.65
DIO6
  Top 0.254: U3.11 77.76,30.26 79.76,32.26 JP8.10
DIO7
  Top 0.254: U3.13 78.84,26.26 79.76,27.18 JP8.8
DIO8  (via drill 0.51)
  Top 0.254: JP8.6 82.14,22.26 U3.15 75.79,22.26 v74.68,23.37 | v61.92,58.65 62.08,58.65 63.25,59.82 71.46,59.82 72.33,58.95 R14.2
  Bottom 0.254: v74.68,23.37 74.68,33.53 69.6,38.61 69.6,51.36 62.31,58.65 v61.92,58.65
DIO9
  Top 0.254: U2.13 24.99,26.26 25.91,27.18 JP3.8
DIO10
  Top 0.254: JP8.4 81.06,18.26 U3.17 76.15,19.36 73.41,22.1 69.6,22.1 68.33,23.37 SJ4.2
DIO11
  Top 0.254: U2.7 44.07,24.26 JP2.4
DIO12
  Top 0.254: U2.4 42.45,18.26 JP2.7
DIO13
  Top 0.254: U3.18 79.15,15.09 79.76,14.48 JP8.3
DIO14
  Top 0.254: JP8.2 80.64,13.59 79.25,13.59 78.58,14.26 U3.19
DIO15
  Top 0.254: U3.20 79.15,10.01 79.76,9.4 JP8.1
DIO16
  Top 0.254: U3.7 97.92,24.26 JP9.4
DIO17
  Top 0.254: U3.4 96.3,18.26 JP9.7
DIO18
  Top 0.254: U7.11 131.6,30.26 133.6,32.26 JP15.10
DIO19
  Top 0.254: U7.13 132.68,26.26 133.6,27.18 JP15.8
DIO20  (via drill 0.51)
  Top 0.254: JP15.6 135.98,22.26 U7.15 129.63,22.26 v128.52,23.37 | v115.77,58.65 115.93,58.65 117.09,59.82 125.31,59.82 126.17,58.95 R23.2
  Bottom 0.254: v128.52,23.37 128.52,33.53 123.44,38.61 123.44,51.36 116.15,58.65 v115.77,58.65
DIO21
  Top 0.254: JP15.4 134.9,18.26 U7.17 129.99,19.36 127.25,22.1 123.44,22.1 122.17,23.37 SJ7.2
DIO22
  Top 0.254: U7.18 132.99,15.09 133.6,14.48 JP15.3
DIO23
  Top 0.254: JP15.2 134.49,13.59 133.1,13.59 132.43,14.26 U7.19
DIO24
  Top 0.254: U7.20 132.99,10.01 133.6,9.4 JP15.1
DIO25
  Top 0.254: U7.7 151.76,24.26 JP16.4
DIO26
  Top 0.254: U7.4 150.14,18.26 JP16.7
DIO27
  Top 0.254: U10.11 23.91,90.46 25.91,92.46 JP22.10
DIO28
  Top 0.254: U10.13 24.99,86.46 25.91,87.38 JP22.8
DIO29  (via drill 0.51)
  Top 0.254: JP22.6 28.29,82.46 U10.15 21.94,82.46 v20.83,83.57 | v8.08,118.85 8.23,118.85 9.4,120.02 17.61,120.02 18.48,119.15 R32.2
  Bottom 0.254: v20.83,83.57 20.83,93.73 15.75,98.81 15.75,111.56 8.46,118.85 v8.08,118.85
DIO30
  Top 0.254: JP22.4 27.21,78.46 U10.17 22.3,79.56 19.56,82.3 15.75,82.3 14.48,83.57 SJ10.2
DIO31
  Top 0.254: U10.18 25.3,75.29 25.91,74.68 JP22.3
DIO32
  Top 0.254: JP22.2 26.8,73.79 25.4,73.79 24.73,74.46 U10.19
DIO33
  Top 0.254: U10.20 25.3,70.21 25.91,69.6 JP22.1
DIO34
  Top 0.254: U10.7 44.07,84.46 JP23.4
DIO35
  Top 0.254: U10.4 42.45,78.46 JP23.7
DIO36
  Top 0.254: U13.11 77.76,90.46 79.76,92.46 JP29.10
DIO37
  Top 0.254: U13.13 78.84,86.46 79.76,87.38 JP29.8
DIO38  (via drill 0.51)
  Top 0.254: JP29.6 82.14,82.46 U13.15 75.79,82.46 v74.68,83.57 | v61.92,118.85 62.08,118.85 63.25,120.02 71.46,120.02 72.33,119.15 R41.2
  Bottom 0.254: v74.68,83.57 74.68,93.73 69.6,98.81 69.6,111.56 62.31,118.85 v61.92,118.85
DIO39
  Top 0.254: JP29.4 81.06,78.46 U13.17 76.15,79.56 73.41,82.3 69.6,82.3 68.33,83.57 SJ13.2
DIO40
  Top 0.254: U13.18 79.15,75.29 79.76,74.68 JP29.3
DIO41
  Top 0.254: JP29.2 80.64,73.79 79.25,73.79 78.58,74.46 U13.19
DIO42
  Top 0.254: U13.20 79.15,70.21 79.76,69.6 JP29.1
DIO43
  Top 0.254: U13.7 97.92,84.46 JP30.4
DIO44
  Top 0.254: U13.4 96.3,78.46 JP30.7
DIO45
  Top 0.254: U16.11 131.6,90.46 133.6,92.46 JP36.10
DIO46
  Top 0.254: U16.13 132.68,86.46 133.6,87.38 JP36.8
DIO47  (via drill 0.51)
  Top 0.254: JP36.6 135.98,82.46 U16.15 129.63,82.46 v128.52,83.57 | v115.77,118.85 115.93,118.85 117.09,120.02 125.31,120.02 126.17,119.15 R50.2
  Bottom 0.254: v128.52,83.57 128.52,93.73 123.44,98.81 123.44,111.56 116.15,118.85 v115.77,118.85
DIO48
  Top 0.254: JP36.4 134.9,78.46 U16.17 129.99,79.56 127.25,82.3 123.44,82.3 122.17,83.57 SJ16.2
DIO49
  Top 0.254: U16.18 132.99,75.29 133.6,74.68 JP36.3
DIO50
  Top 0.254: JP36.2 134.49,73.79 133.1,73.79 132.43,74.46 U16.19
DIO51
  Top 0.254: U16.20 132.99,70.21 133.6,69.6 JP36.1
DIO52
  Top 0.254: U16.7 151.76,84.46 JP37.4
DIO53
  Top 0.254: U16.4 150.14,78.46 JP37.7
DIO54
  Top 0.254: U19.11 23.91,150.65 25.91,152.65 JP43.10
DIO55
  Top 0.254: U19.13 24.99,146.65 25.91,147.57 JP43.8
DIO56  (via drill 0.51)
  Top 0.254: JP43.6 28.29,142.65 U19.15 21.94,142.65 v20.83,143.76 | v8.08,179.04 8.23,179.04 9.4,180.21 17.61,180.21 18.48,179.35 R59.2
  Bottom 0.254: v20.83,143.76 20.83,153.92 15.75,159 15.75,171.75 8.46,179.04 v8.08,179.04
DIO57